# EAGLE board 3020 MFD2 V1_1 (EAGLE 7.3.0), part 1 of 2
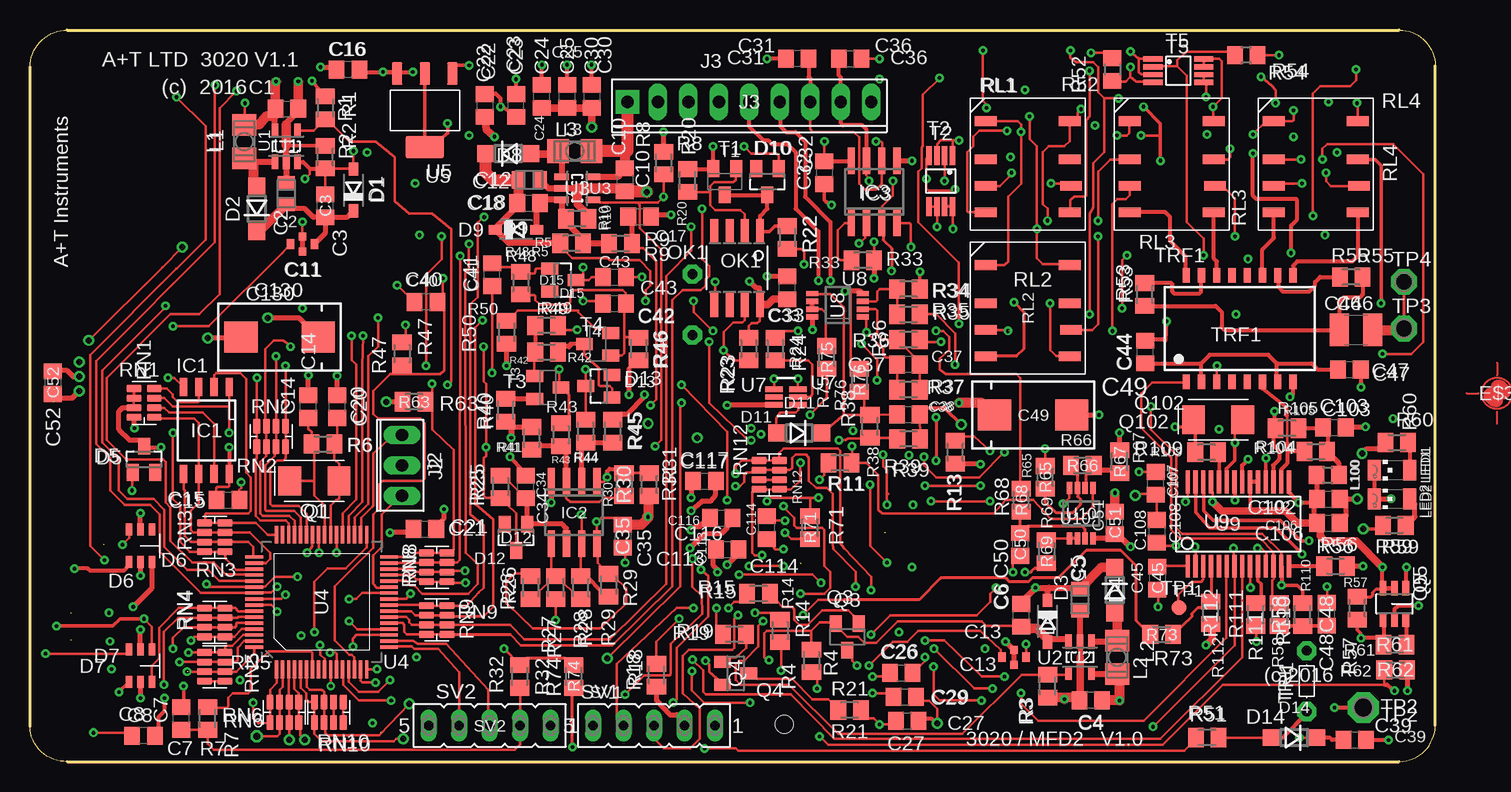
[diagram p0: board, top side]
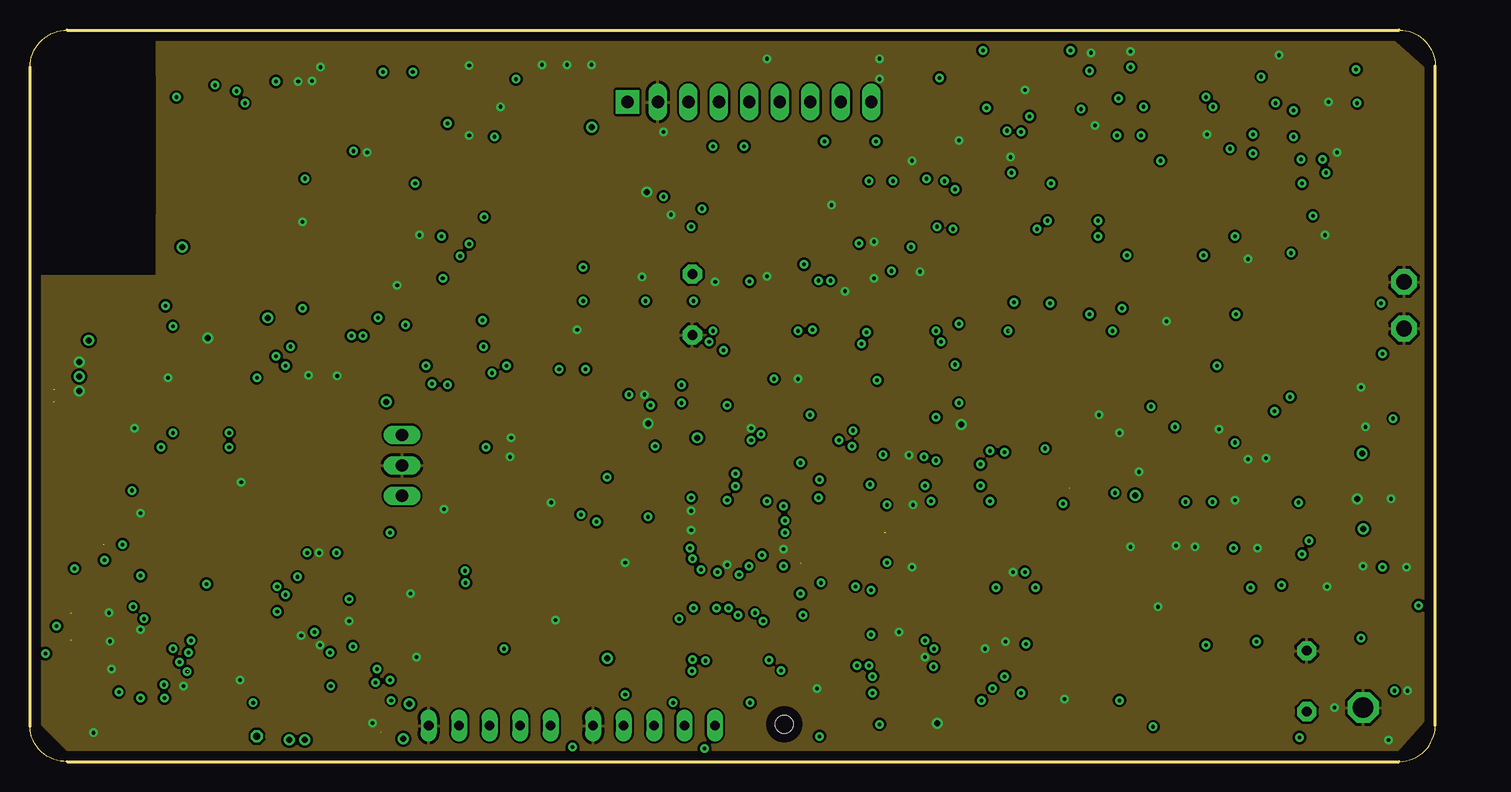
[diagram p1: board, inner layer GND]
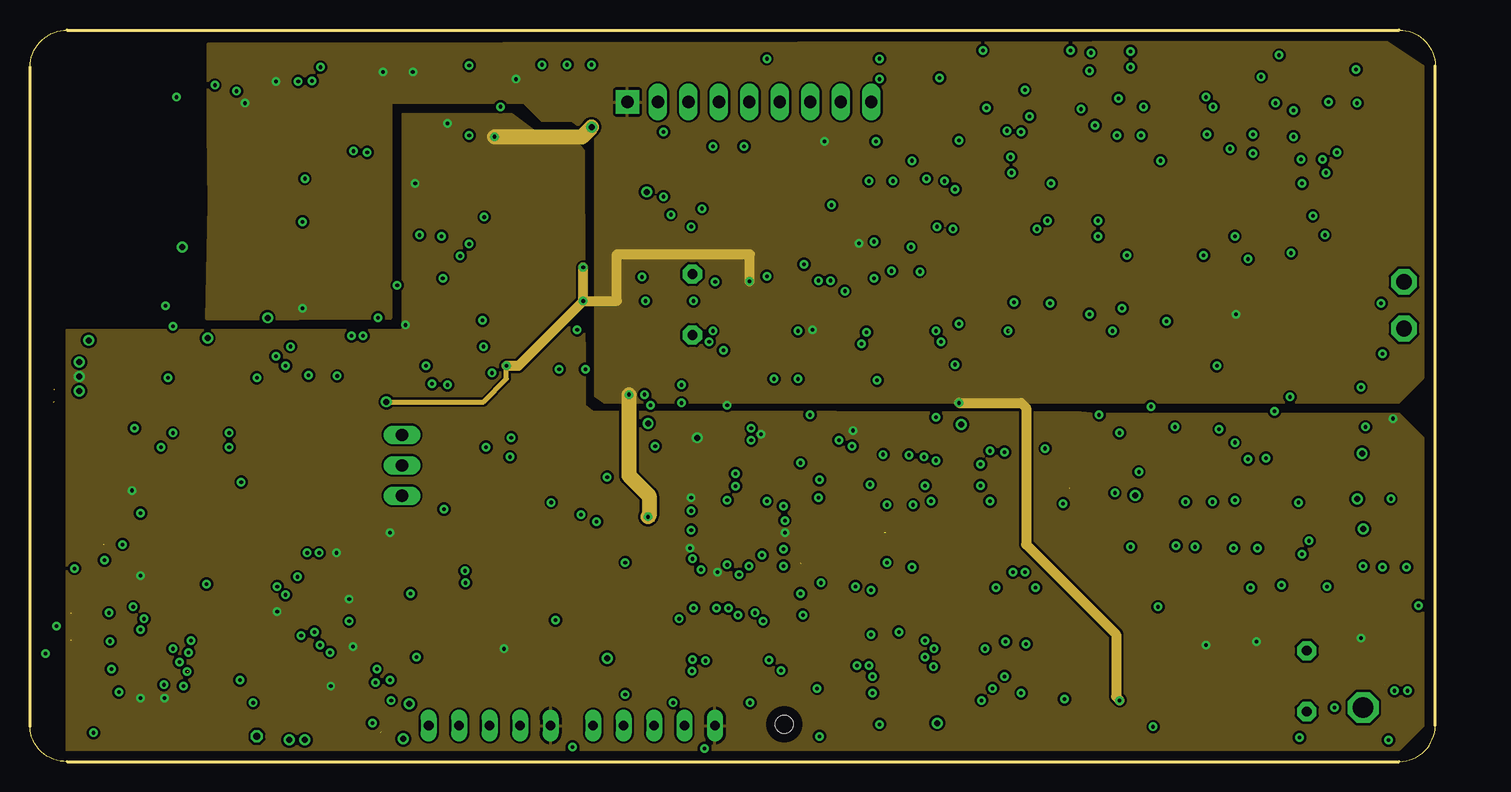
[diagram p2: board, inner layer 3V3&5V]
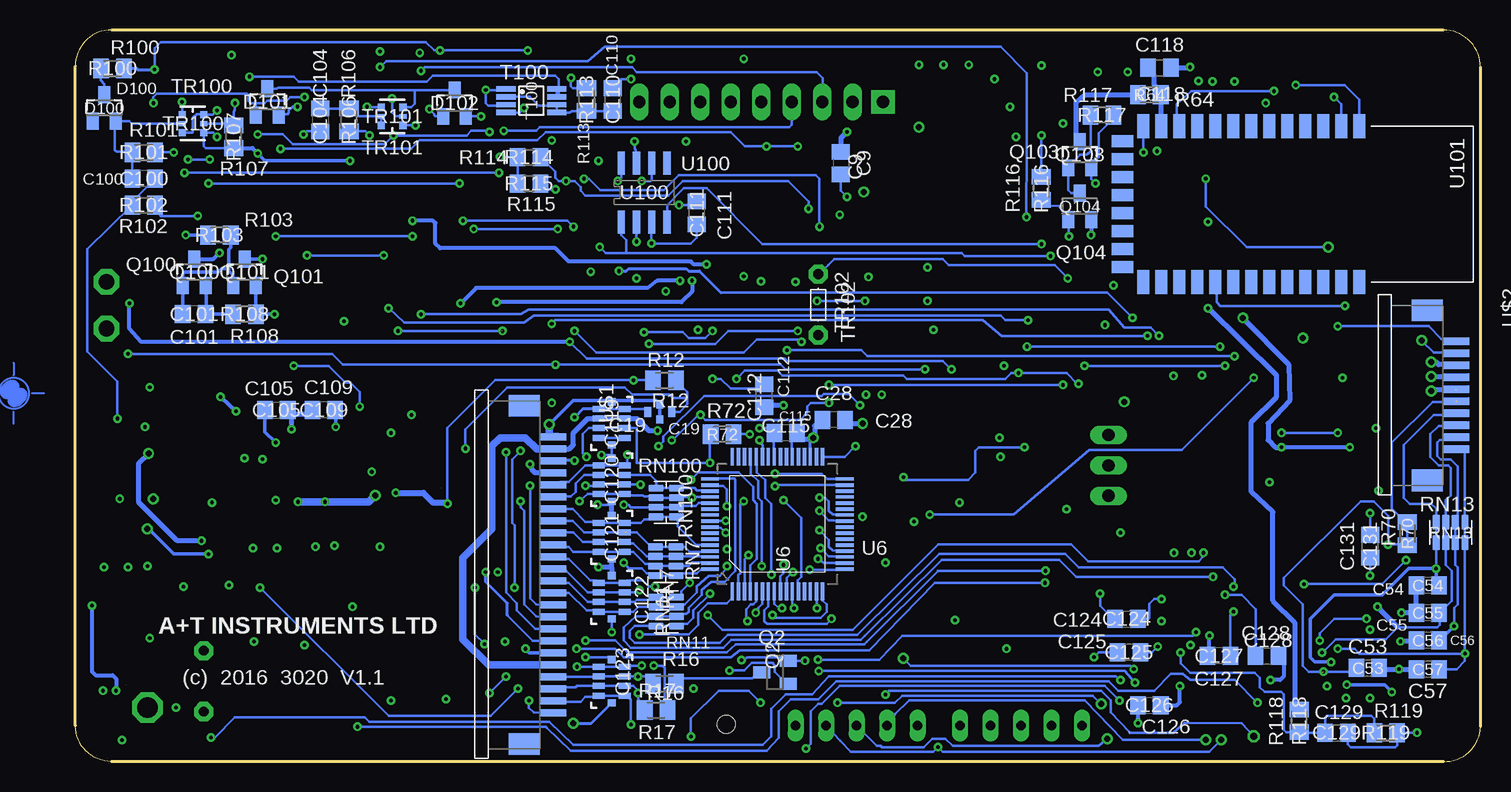
[diagram p3: board, bottom side, seen from below]

Size 117.1 x 61 mm. Coordinates in mm from the lower left corner, seen from the top.
Outline: 3.1,0 114.1,0 arc90 117.1,3 117.1,58 arc90 114.1,61 3.1,61 arc90 0,57.9 0,2.9 arc90 3.1,0
Copper layers (1*2*15*16): Top-VerticalRoutes 0.035mm / dielectric 0.5mm / GND 0.035mm / dielectric 0.5mm / 3V3&5V 0.035mm / dielectric 0.5mm / BottomnHorizontalroutes 0.035mm
Design rules "default *": minimum track width 0.2mm, minimum drill 0.3mm, track to track 6mil, track to pad 6mil, pad to pad 6mil, via to via 6mil, smd to smd 6mil, copper to edge 30mil, drill to drill 8mil, minimum pad ring 10mil, minimum via ring 8mil, stop-mask expansion 4mil, vias tented up to drill 0.31mm, thermal gap 10mil
Net classes: 0 default: width 0.2 mm, drill 0.2 mm, clearance 0.2 mm; 1 GND: width 0.2 mm, drill 0.2 mm, clearance 0.2 mm to class 0, clearance 0.2 mm; 2 5V: width 0.2 mm, drill 0.2 mm, clearance 0.2 mm to class 0, clearance 0.2 mm; 3 3v3: width 0.2 mm, drill 0.2 mm, clearance 0.2 mm to class 0, clearance 0.2 mm to class 1, clearance 0.2 mm to class 2, clearance 0.2 mm
Holes 1.5 mm at 62.85,3.1

## Footprints (pad centres in the part's own frame; a part is rotated, then mirrored left to right if it is on the bottom)
C0805 = smd 1.3 x 1.5: 1 -0.95,0; 2 0.95,0
CAPC2012X94N = smd 1.118 x 1.448: 1 -0.914,0; 2 0.914,0
MURATA_NFM21PC = smd 0.6 x 0.8: 1 -1,0; 3 1,0 | smd 0.6 x 0.65: 2 0,-0.625; 4 0,0.625
C1210 = smd 1.6 x 2.7: 1 -1.4,0; 2 1.4,0
CAPC7343X31 = smd 2.77 x 2.55: + 3.22,0; - -3.22,0
NFA31C-MURATA-SHORTED = smd 0.6 x 0.7: 1 -1.8,0; 2 1.8,0 | smd 0.5 x 1: 3 -1.2,-1.1; 4 -0.4,-1.1; 5 0.4,-1.1; 6 1.2,-1.1; 7 -1.2,1.1; 8 -0.4,1.1; 9 0.4,1.1; 10 1.2,1.1
SOD3616X135N-(SOD123) = smd 1.1 x 0.8: A 1.735,0 | smd 1.11 x 0.8: C -1.735,0
SOD123 = smd 1.4 x 1.4: A 1.9,0; C -1.9,0
SOT23 = smd 1 x 1.4: 1 -0.95,-1.1; 2 0.95,-1.1; 3 0,1.1
SOT23-6 = smd 0.55 x 1: 1 -0.95,-1.35; 2 0,-1.35; 3 0.95,-1.35; 4 0.95,1.35; 5 0,1.35; 6 -0.95,1.35
SOIC127P794203-L25N = smd 0.6 x 1.5: 1 -1.905,-3.63; 2 -0.635,-3.63; 3 0.635,-3.63; 4 1.905,-3.63; 5 1.905,3.63; 6 0.635,3.63; 7 -0.635,3.63; 8 -1.905,3.63
SO08 = smd 0.6 x 2.2: 1 -1.905,-2.6; 2 -0.635,-2.6; 3 0.635,-2.6; 4 1.905,-2.6; 5 1.905,2.6; 6 0.635,2.6; 7 -0.635,2.6; 8 -1.905,2.6
SO-08 = smd 0.6 x 2.2: 1 -1.905,-2.6; 2 -0.635,-2.6; 3 0.635,-2.6; 4 1.905,-2.6; 5 1.905,2.6; 6 0.635,2.6; 7 -0.635,2.6; 8 -1.905,2.6
10X03MTA = drill 1.016 long: 1 2.54,0; 2 0,0; 3 -2.54,0
10X09MTA = drill 1.016 pad 1.93 square: 1 10.16,0 | drill 1.016 long: 2 7.62,0; 3 5.08,0; 4 2.54,0; 5 0,0; 6 -2.54,0; 7 -5.08,0; 8 -7.62,0; 9 -10.16,0
L3225P = smd 1.8 x 2: 1 -1.4,0; 2 1.4,0
INDC2012X90 = smd 1.3 x 1.5: 1 -0.95,0; 2 0.95,0
LEDC3216X110L60N = smd 1.73 x 1.1: A 0,-1.47; C 0,1.47
SOIC08 = smd 0.66 x 2.032: 1 -1.905,-3.073; 2 -0.635,-3.073; 3 0.635,-3.073; 4 1.905,-3.073; 5 1.905,3.073; 6 0.635,3.073; 7 -0.635,3.073; 8 -1.905,3.073
ABRACON-ABM3 = smd 1.9 x 2.4: 1 -2.05,0; 2 2.05,0
SOT23-6' = smd 0.55 x 1.2: 1 -0.95,-1.3; 2 0,-1.3; 3 0.95,-1.3; 4 0.95,1.3; 5 0,1.3; 6 -0.95,1.3
M0805 = smd 1.3 x 1.6: 1 -0.95,0; 2 0.95,0
R0805 = smd 1.3 x 1.5: 1 -0.95,0; 2 0.95,0
OMRON-G6K-2F = smd 0.8 x 1.8: 1 -3.6,-3.5; 2 -0.4,-3.5; 3 1.8,-3.5; 4 4,-3.5; 5 4,3.5; 6 1.8,3.6; 7 -0.4,3.5; 8 -3.6,3.5
RESCAV80P325X165X90-8M = smd 0.6 x 1.22: 1 -1.2,-0.85; 2 -0.4,-0.85; 3 0.4,-0.85; 4 1.2,-0.85 | smd 0.6 x 1.25: 5 1.2,0.85; 6 0.4,0.85; 7 -0.4,0.85; 8 -1.2,0.85
RESCAV80P325X165X90-8M-SHORTED = smd 0.6 x 1.22: 1 -1.2,-0.85; 2 -0.4,-0.85; 3 0.4,-0.85; 4 1.2,-0.85 | smd 0.6 x 1.25: 5 1.2,0.85; 6 0.4,0.85; 7 -0.4,0.85; 8 -1.2,0.85
FE05-1 = drill 0.813 long: 1 -5.08,0; 2 -2.54,0; 3 0,0; 4 2.54,0; 5 5.08,0
SOT23-BEC = smd 1 x 1.4: B -0.95,-1.1; C 0,1.1; E 0.95,-1.1
SOP65P490X110-8L40N = smd 0.45 x 1.59: 1 -0.975,-2.115; 2 -0.325,-2.115; 3 0.325,-2.115; 4 0.975,-2.115; 5 0.975,2.115; 6 0.325,2.115; 7 -0.325,2.115; 8 -0.975,2.115
B1,27 = smd 1.27 x 1.27: TP 0,0
P1-17 = drill 1.702 pad 2.54 octagon: TP 0,0
P1-13 = drill 1.321 pad 2.159 octagon: TP 0,0
R-5 = drill 0.813 pad 1.6 octagon: 1 -2.54,0; 2 2.54,0
SOT363(SC-88) = smd 0.6 x 0.6: 1 -0.9,0.75; 3 -0.9,-0.75; 4 0.9,-0.75; 6 0.9,0.75 | smd 0.6 x 0.4: 2 -0.9,0; 5 0.9,0
N5 = smd 0.6 x 1.2: 1 -4.445,-4.445; 2 -3.175,-4.445; 3 -1.905,-4.445; 4 -0.635,-4.445; 5 0.635,-4.445; 6 1.905,-4.445; 7 3.175,-4.445; 8 4.445,-4.445; 9 4.445,4.445; 10 3.175,4.445; 11 1.905,4.445; 12 0.635,4.445; 13 -0.635,4.445; 14 -1.905,4.445; 15 -3.175,4.445; 16 -4.445,4.445
SOT23-5 = smd 0.55 x 1.2: 1 -0.95,-1.3; 2 0,-1.3; 3 0.95,-1.3; 4 0.95,1.3; 5 -0.95,1.3
QFP64-10X10MC = smd 1.473 x 0.279: 1 -5.613,3.759; 2 -5.613,3.251; 3 -5.613,2.743; 4 -5.613,2.261; 5 -5.613,1.753; 6 -5.613,1.245; 7 -5.613,0.762; 8 -5.613,0.254; 9 -5.613,-0.254; 10 -5.613,-0.762; 11 -5.613,-1.245; 12 -5.613,-1.753; 13 -5.613,-2.261; 14 -5.613,-2.743; 15 -5.613,-3.251; 16 -5.613,-3.759; 33 5.613,-3.759; 34 5.613,-3.251; 35 5.613,-2.743; 36 5.613,-2.261; 37 5.613,-1.753; 38 5.613,-1.245; 39 5.613,-0.762; 40 5.613,-0.254; 41 5.613,0.254; 42 5.613,0.762; 43 5.613,1.245; 44 5.613,1.753; 45 5.613,2.261; 46 5.613,2.743; 47 5.613,3.251; 48 5.613,3.759 | smd 0.279 x 1.473: 17 -3.759,-5.613; 18 -3.251,-5.613; 19 -2.743,-5.613; 20 -2.261,-5.613; 21 -1.753,-5.613; 22 -1.245,-5.613; 23 -0.762,-5.613; 24 -0.254,-5.613; 25 0.254,-5.613; 26 0.762,-5.613; 27 1.245,-5.613; 28 1.753,-5.613; 29 2.261,-5.613; 30 2.743,-5.613; 31 3.251,-5.613; 32 3.759,-5.613; 49 3.759,5.613; 50 3.251,5.613; 51 2.743,5.613; 52 2.261,5.613; 53 1.753,5.613; 54 1.245,5.613; 55 0.762,5.613; 56 0.254,5.613; 57 -0.254,5.613; 58 -0.762,5.613; 59 -1.245,5.613; 60 -1.753,5.613; 61 -2.261,5.613; 62 -2.743,5.613; 63 -3.251,5.613; 64 -3.759,5.613
SOT230P700X180-4L = smd 0.89 x 1.88: 1 -2.3,-3.065; 2 0,-3.065; 3 2.3,-3.065 | smd 3.23 x 1.88: 4 0,3.065
SOT65P210X100-6M = smd 0.44 x 1.53: 1 -0.65,-0.99; 2 0,-0.99; 3 0.65,-0.99; 4 0.65,0.99; 5 0,0.99; 6 -0.65,0.99
MSOP8 = smd 0.45 x 1.016: 1 -0.975,-2.1; 2 -0.325,-2.1; 3 0.325,-2.1; 4 0.975,-2.1; 5 0.975,2.1; 6 0.325,2.1; 7 -0.325,2.1; 8 -0.975,2.1
SOP65P780X200-28N = smd 0.45 x 1.9: 1 -4.225,-3.505; 2 -3.575,-3.505; 3 -2.925,-3.505; 4 -2.275,-3.505; 5 -1.625,-3.505; 6 -0.975,-3.505; 7 -0.325,-3.505; 8 0.325,-3.505; 9 0.975,-3.505; 10 1.625,-3.505; 11 2.275,-3.505; 12 2.925,-3.505; 13 3.575,-3.505; 14 4.225,-3.505; 15 4.225,3.505; 16 3.575,3.505; 17 2.925,3.505; 18 2.275,3.505; 19 1.625,3.505; 20 0.975,3.505; 21 0.325,3.505; 22 -0.325,3.505; 23 -0.975,3.505; 24 -1.625,3.505; 25 -2.275,3.505; 26 -2.925,3.505; 27 -3.575,3.505; 28 -4.225,3.505
SOIC127P600X175-8L87N = smd 0.6 x 1.91: 1 -1.905,-2.46; 2 -0.635,-2.46; 3 0.635,-2.46; 4 1.905,-2.46; 5 1.905,2.46; 6 0.635,2.46; 7 -0.635,2.46; 8 -1.905,2.46
BLUETOOTH_SMD = smd 2 x 1: 1 0,0; 2 0,-1.5; 3 0,-3; 4 0,-4.5; 5 0,-6; 6 0,-7.5; 7 0,-9; 8 0,-10.5; 9 0,-12; 10 0,-13.5; 11 0,-15; 12 0,-16.5; 13 0,-18; 22 13,-18; 23 13,-16.5; 24 13,-15; 25 13,-13.5; 26 13,-12; 27 13,-10.5; 28 13,-9; 29 13,-7.5; 30 13,-6; 31 13,-4.5; 32 13,-3; 33 13,-1.5; 34 13,0 | smd 1 x 1.8: 14 1.25,-19.75; 15 2.75,-19.75; 16 4.25,-19.75; 17 5.75,-19.75; 18 7.25,-19.75; 19 8.75,-19.75; 20 10.25,-19.75; 21 11.75,-19.75
68612414422 = smd 0.6 x 2.2: 1 -15.77,1.1; 2 -14.77,1.1; 3 -13.77,1.1; 4 -12.77,1.1; 5 -11.77,1.1; 6 -10.77,1.1; 7 -9.77,1.1; 8 -8.77,1.1; 9 -7.77,1.1; 10 -6.77,1.1; 11 -5.77,1.1; 12 -4.77,1.1; 13 -3.77,1.1; 14 -2.77,1.1; 15 -1.77,1.1; 16 -0.77,1.1; 17 0.23,1.1; 18 1.23,1.1; 19 2.23,1.1; 20 3.23,1.1; 21 4.23,1.1; 22 5.23,1.1; 23 6.23,1.1; 24 7.23,1.1 | smd 1.8 x 2.6: Z1 -18.37,-1.3; Z2 9.83,-1.3
CONN_10_WAY_FLEX = smd 0.6 x 2.2: 1 -4.34,2.37; 2 -3.34,2.37; 3 -2.34,2.37; 4 -1.34,2.37; 5 -0.34,2.37; 6 0.66,2.37; 7 1.66,2.37; 8 2.66,2.37; 9 3.66,2.37; 10 4.66,2.37 | smd 1.8 x 2.6: Z1 -6.94,-0.03; Z2 7.26,-0.03

## Placement (x,y rotation side)
C1  10u  [C0805]  21.4,54.42 0 top
C2  1u 35V  [CAPC2012X94N]  21.35,47.35 90 top
C3  DNF  [C0805]  24.6,46.34 90 top
C4  10u  [C0805]  88.4,5.1 180 top
C5  1u 35V  [CAPC2012X94N]  87.5,13.5 270 top
C6  DNF  [C0805]  82.6,12.2 90 top
C7  DNF  [C0805]  12.6,3.6 90 top
C8  100n  [C0805]  9.45,2.15 180 top
C9  100n  [C0805]  53.3,49.9 270 bottom
C10  10u  [C0805]  49.55,48.5 270 top
C11  NFM21PC475B1A3  [MURATA_NFM21PC]  22.7,43.15 180 top
C12  1u 35V  [CAPC2012X94N]  41.6,48.5 180 top
C13  NFM21PC475B1A3  [MURATA_NFM21PC]  82,8.7 180 top
C14  18p  [C0805]  23.2,29.6 90 top
C15  100n  [C0805]  16.5,21.8 0 top
C16  100n  [C0805]  26.5,57.7 180 top
C17  4u7  [C0805]  50.8,45.45 0 top
C18  22p  [C0805]  41.55,46.55 0 top
C19  NFM21PC475B1A3  [MURATA_NFM21PC]  68.4,29.15 180 bottom
C20  18p  [C0805]  25.6,29.6 90 top
C21  100n  [C0805]  32.9,19.4 0 top
C22  22u  [C0805]  37.9,54.7 270 top
C23  10u  [C0805]  40.5,54.7 90 top
C24  1n  [C0805]  42.65,55.45 90 top
C25  100n  [C0805]  44.77,55.45 90 top
C26  100n  [C0805]  72.6,7.4 0 top
C27  100n  [C0805]  73.1,3.4 0 top
C28  100n  [C0805]  53.9,28.5 180 bottom
C29  100n  [C0805]  72.9,5.4 0 top
C30  22u  [C0805]  46.8,55.45 270 top
C31  1n  [C0805]  63.94,58.6 180 top
C32  100n  [C0805]  66.2,49.1 270 top
C33  100n  [C0805]  63.1,39.5 90 top
C34  1n  [C0805]  41.3,22.9 90 top
C35  100n  [C0805]  49.4,18.8 270 top
C36  1n  [C0805]  68.35,58.6 0 top
C37  18p  [C0805]  73.2,33.1 180 top
C38  100n  [C0805]  73.2,28.94 0 top
C39  100n  [C0805]  110.4,1.8 0 top
C40  100n  [C0805]  33,38.3 180 top
C41  10u  [C0805]  38.5,40.6 90 top
C42  1n  [C0805]  48.7,38.2 0 top
C43  100n  [C0805]  48.7,40.4 0 top
C44  10n  [C0805]  92.95,34.15 90 top
C45  10u  [C0805]  93.95,15.3 270 top
C46  1n 2kV  [C1210]  110.5,36 0 top
C47  10n  [C0805]  109.95,32.7 0 top
C48  100n  [C0805]  108.05,12.3 90 top
C49  100u  [CAPC7343X31]  83.6,28.9 180 top
C50  4u7  [C0805]  82.5,18.1 270 top
C51  100n  [C0805]  90.4,19.9 90 top
C52  100n  [C0805]  1.9,31.6 270 top
C53  DNF  [C0805]  9.4,7.8 0 bottom
C54  DNF  [C0805]  4.4,14.7 180 bottom
C55  DNF  [C0805]  4.4,12.4 180 bottom
C56  DNF  [C0805]  4.4,10.1 180 bottom
C57  DNF  [C0805]  4.4,7.7 180 bottom
C100  1u  [C0805]  111.4,48.6 180 bottom
C101  10N  [C0805]  107.2,37.3 180 bottom
C102  100n  [C0805]  108.2,21.9 0 top
C103  100n  [C0805]  108.7,27.85 0 top
C104  1u  [C0805]  96.7,53.5 270 bottom
C105  27p  [C0805]  100.35,29.3 0 bottom
C106  100n  [C0805]  108.2,19.9 0 top
C107  100n  [C0805]  93.8,23.2 90 top
C108  100n  [C0805]  93.9,19.2 270 top
C109  27p  [C0805]  96.4,29.3 180 bottom
C110  100n  [C0805]  72.3,55.2 90 bottom
C111  100n  [C0805]  65.3,45.75 90 bottom
C112  100n  [C0805]  59.7,30.5 90 bottom
C113  100n  [C0805]  58.1,17.7 0 top
C114  10u  [C0805]  61.4,19.5 90 top
C115  100n  [C0805]  57.9,27.4 180 bottom
C116  100n  [C0805]  57.6,20.3 0 top
C117  100n  [C0805]  56.2,23.4 0 top
C118  100n  [C0805]  26.75,57.85 0 bottom
C119  MURATA-NFA31CC  [NFA31C-MURATA-SHORTED]  72.4,28.2 90 bottom
C120  MURATA-NFA31CC  [NFA31C-MURATA-SHORTED]  72.4,23.5 90 bottom
C121  MURATA-NFA31CC  [NFA31C-MURATA-SHORTED]  72.4,18.7 90 bottom
C122  MURATA-NFA31CC  [NFA31C-MURATA-SHORTED]  72.4,13.7 90 bottom
C123  MURATA-NFA31CC  [NFA31C-MURATA-SHORTED]  72.4,6.7 90 bottom
C124  100n  [C0805]  29.5,11.9 0 bottom
C125  100n  [C0805]  29.3,9.1 180 bottom
C126  100n  [C0805]  27.6,4.7 0 bottom
C127  100n  [C0805]  21.8,8.8 180 bottom
C128  10u  [C0805]  17.8,8.8 0 bottom
C129  100n  [C0805]  12,2.4 0 bottom
C130  100u  [CAPC7343X31]  20.8,35.4 0 top
C131  100n  [C0805]  9.2,17.95 90 bottom
D1  24V 500mW  [SOD3616X135N-(SOD123)]  26.95,47.65 90 top
D2  MBR0530  [SOD123]  18.9,46.08 90 top
D3  24V 500mW  [SOD3616X135N-(SOD123)]  84.8,11.7 270 top
D4  MBR0530  [SOD123]  90.4,14.3 270 top
D5  BAT54  [SOT23]  9.5,25.2 0 top
D6  TPD4E001DBV  [SOT23-6]  9.2,18 180 top
D7  TPD4E001DBV  [SOT23-6]  9.2,8 180 top
D8  MBR0530  [SOD123]  39.85,50.7 0 top
D9  24V 500mW  [SOD3616X135N-(SOD123)]  40.5,44.35 0 top
D10  BAV199  [SOT23]  61.45,48.35 180 top
D11  MBR0530  [SOD123]  64.1,27.4 180 top
D12  BAV199  [SOT23]  40.5,18.7 180 top
D13  BAV199  [SOT23]  47.4,31.3 90 top
D14  MBR0530  [SOD123]  105.34,2 180 top
D15  BAV199  [SOT23]  44.4,40.14 270 top
D100  BAT54A  [SOT23]  114.7,54.5 0 bottom
D101  BAT54A  [SOT23]  101.1,55 0 bottom
D102  BAT54A  [SOT23]  85.5,54.9 0 bottom
E$1  [PASS-ROUND]  -5.9,55 0 top  (outside the outline)
E$2  [PASS-ROUND]  -5.9,6 0 top  (outside the outline)
E$3  [PASS-ROUND]  122.25,30.7 0 top  (outside the outline)
IC1  SST26VF064B  [SOIC127P794203-L25N]  14.7,27.6 180 top
IC2  TLC393D  [SO08]  45.34,20.78 180 top
IC3  SN65176D  [SO-08]  70.35,47.5 0 top
J2  1X3  [10X03MTA]  31,24.7 90 top
J3  B06-1X9-AG1-G  [10X09MTA]  59.95,55 180 top
L1  1224AS-H-100M  [L3225P]  17.85,51.7 270 top
L2  1224AS-H-100M  [L3225P]  90.6,8.7 90 top
L3  1224AS-H-100M  [L3225P]  45.4,50.9 180 top
L100  120R@100M  [INDC2012X90]  108.15,23.9 0 top
LED1  GRN  [LEDC3216X110L60N]  113.5,24.3 90 top
LED2  YLW  [LEDC3216X110L60N]  113.5,21.9 90 top
OK1  HCPL0530  [SOIC08]  58.93,41.16 180 top
Q1  12MHz  [ABRACON-ABM3]  23.7,23.4 0 top
Q2  BSS123  [SOT23]  58.8,7.45 90 bottom
Q3  BSS123  [SOT23]  68.1,10.4 180 top
Q4  BSS123  [SOT23]  58.8,7.35 270 top
Q5  TPS2708  [SOT23-6']  113.7,13.15 180 top
Q100  NTR2101P  [SOT23]  107.2,40.8 0 bottom
Q101  BC807  [SOT23]  103,40.8 0 bottom
Q102  25MHz  [ABRACON-ABM3]  99,28.5 0 top
Q103  NTR2101P  [SOT23]  33.4,50.6 0 bottom
Q104  BSS123  [SOT23]  33.4,46.3 0 bottom
R1  100k  [M0805]  24.6,54.5 90 top
R2  59R  [M0805]  24.6,50.4 270 top
R3  100k  [M0805]  84.8,6.3 270 top
R4  59R  [M0805]  65.13,8.4 90 top
R5  680k  [M0805]  45.14,43.21 0 top
R6  1M  [M0805]  24.41,26.47 180 top
R7  100  [M0805]  14.8,3.6 270 top
R8  100k  [M0805]  52.8,49.9 90 top
R9  DNF for 3020  [M0805]  49.2,43.2 180 top
R10  100k  [M0805]  45.6,45.25 0 top
R11  100k  [M0805]  67.5,24.9 0 top
R12  DNF for 3020  [M0805]  68,31.8 180 bottom
R13  100R  [M0805]  77.1,25.8 270 top
R14  1k  [M0805]  62.5,10.9 90 top
R15  1k  [M0805]  60.7,14 0 top
R16  0R  [M0805]  68,6.5 180 bottom
R17  0R  [M0805]  68.7,4.3 180 bottom
R18  100R  [M0805]  52.2,7.2 270 top
R19  1k  [M0805]  58.7,10.6 0 top
R20  100  [M0805]  54.8,48.45 270 top
R21  0R  [M0805]  68.3,4.3 0 top
R22  680  [M0805]  63.1,43.7 90 top
R23  10K  [M0805]  59.9,34.4 90 top
R24  47R  [M0805]  62.1,34.4 90 top
R25  680k  [M0805]  39.2,22.9 90 top
R26  47k  [M0805]  41.7,14.5 90 top
R27  56k  [M0805]  43.8,14.5 90 top
R28  200k  [M0805]  45.9,14.5 270 top
R29  4k7  [M0805]  48.2,14.7 90 top
R30  1M5  [M0805]  49.5,23.1 90 top
R31  47k  [M0805]  51.6,23.1 270 top
R32  10K  [M0805]  40.8,7.1 90 top
R33  10k  [M0805]  69.4,41.8 0 top
R34  100K  [M0805]  73.2,39.4 0 top
R35  100k  [M0805]  73.2,37.3 180 top
R36  100k  [M0805]  73.2,35.2 180 top
R37  100k  [M0805]  73.2,31 0 top
R38  1k  [M0805]  70,27.95 270 top
R39  100k  [M0805]  73.22,26.9 0 top
R40  82R  [M0805]  39.65,29.3 270 top
R41  1M5  [M0805]  41.8,26.95 90 top
R42  4k7  [M0805]  43.05,34.15 180 top
R43  47k  [M0805]  44.25,27.25 90 top
R44  47k  [M0805]  46.3,27.55 90 top
R45  470k  [M0805]  48.55,27.55 90 top
R46  10k  [M0805]  50.7,34.4 90 top
R47  10k  [M0805]  31,34 90 top
R48  10k  [M0805]  40.9,39.9 90 top
R49  4k7  [M0805]  43.05,36.35 0 top
R50  82R  [M0805]  39.7,35.8 90 top
R51  10k  [M0805]  98.1,2 0 top
R52  1M  [R0805]  90.2,57.7 270 top
R53  75R  [M0805]  92.9,38.95 270 top
R54  1M  [R0805]  101.35,58.9 180 top
R55  75R  [M0805]  110.1,40.4 0 top
R56  2.32k 1%  [M0805]  108.8,16.3 180 top
R57  DNF  [M0805]  110.6,12.8 270 top
R58  49R9  [M0805]  104.1,12.25 90 top
R59  180R  [M0805]  113.7,19.7 180 top
R60  180R  [M0805]  113.9,26.6 180 top
R61  DNF  [M0805]  113.75,9.75 180 top
R62  100k  [M0805]  113.8,7.65 180 top
R63  10k  [M0805]  32,30 0 top
R64  1R  [M0805]  27.6,55.6 180 bottom
R65  100R  [M0805]  84.6,23.7 270 top
R66  100k  [M0805]  87.7,24.7 180 top
R67  100k  [M0805]  90.8,25 270 top
R68  100k  [M0805]  82.6,21.8 270 top
R69  100R  [M0805]  84.7,17.5 90 top
R70  DNF  [M0805]  6.1,19 90 bottom
R71  4k7  [M0805]  65,19.5 270 top
R72  4k7  [M0805]  63.2,27.3 0 bottom
R73  100R  [M0805]  94.3,10.6 180 top
R74  10k  [M0805]  45.3,7.1 90 top
R75  DNF  [M0805]  66.4,33.7 270 top
R76  DNF  [M0805]  69.1,31.8 90 top
R100  10k  [M0805]  114,57.8 180 bottom
R101  10k  [M0805]  111.4,50.8 180 bottom
R102  100k  [M0805]  111.4,46.4 180 bottom
R103  10k  [M0805]  105.1,43.9 0 bottom
R104  49R9  [M0805]  107.15,25.85 180 top
R105  49R9  [M0805]  104.75,27.8 0 top
R106  10k  [M0805]  94.3,53.5 270 bottom
R107  10k  [M0805]  103.9,52.1 270 bottom
R108  5R6  [M0805]  103,37.3 0 bottom
R109  100R  [M0805]  98.05,25.8 0 top
R110  49R9  [M0805]  106.05,12.25 270 top
R111  100k  [M0805]  102.15,12.25 270 top
R112  100k  [M0805]  98.4,12.4 270 top
R113  10k  [M0805]  74.5,55.2 90 bottom
R114  1M  [R0805]  79.3,50.4 0 bottom
R115  1M  [R0805]  79.3,48.2 0 bottom
R116  100k  [M0805]  36.6,47.8 270 bottom
R117  100k  [M0805]  31.55,53.9 0 bottom
R118  10k  [M0805]  15.1,3.4 270 bottom
R119  10k  [M0805]  7.9,2.4 180 bottom
RL1  OMRON-G6K-2FY-5VDC  [OMRON-G6K-2F]  83.15,49.8 270 top
RL2  OMRON-G6K-2FY-5VDC  [OMRON-G6K-2F]  83.15,37.8 270 top
RL3  OMRON-G6K-2FY-5VDC  [OMRON-G6K-2F]  95.15,49.8 270 top
RL4  OMRON-G6K-2FY-5VDC  [OMRON-G6K-2F]  107.15,49.8 270 top
RN1  10k  [RESCAV80P325X165X90-8M]  9.5,29.9 90 top
RN2  DNF  [RESCAV80P325X165X90-8M-SHORTED]  20.1,27.1 0 top
RN3  DNF  [RESCAV80P325X165X90-8M-SHORTED]  15.4,18.7 90 top
RN4  DNF  [RESCAV80P325X165X90-8M-SHORTED]  15.4,11.6 90 top
RN5  DNF  [RESCAV80P325X165X90-8M-SHORTED]  15.4,7.9 90 top
RN6  100R  [RESCAV80P325X165X90-8M-SHORTED]  21.2,4.1 0 top
RN7  100R  [RESCAV80P325X165X90-8M-SHORTED]  67.9,16.7 90 bottom
RN8  DNF  [RESCAV80P325X165X90-8M-SHORTED]  33.9,16.2 90 top
RN9  100R  [RESCAV80P325X165X90-8M-SHORTED]  33.9,11.8 90 top
RN10  100R  [RESCAV80P325X165X90-8M-SHORTED]  24.9,4.1 0 top
RN11  100R  [RESCAV80P325X165X90-8M-SHORTED]  67.85,12.5 90 bottom
RN12  100R  [RESCAV80P325X165X90-8M-SHORTED]  61.6,23.9 90 top
RN13  DNF  [RESCAV80P325X165X90-8M-SHORTED]  2.5,19.1 0 bottom
RN100  100R  [RESCAV80P325X165X90-8M-SHORTED]  67.85,21.6 90 bottom
SV1  NOT FITTED  [FE05-1]  52,3 180 top
SV2  NOT FITTED  [FE05-1]  38.3,3 180 top
T1  BC817  [SOT23-BEC]  57.9,48.35 180 top
T2  ZXMD63N03X  [SOP65P490X110-8L40N]  75.9,48.4 180 top
T3  BC817  [SOT23-BEC]  43.15,31.2 270 top
T4  BC807  [SOT23-BEC]  47.3,34.8 90 top
T5  ZXMD63N03X  [SOP65P490X110-8L40N]  95.7,57.6 270 top
T100  ZXMD63N03X  [SOP65P490X110-8L40N]  79.1,55.1 270 bottom
TP1  TPB1,27  [B1,27]  95.75,12.85 0 top
TP2  PTR1PAD1-17  [P1-17]  111.1,4.5 0 top
TP3  PTR1PAD1-13  [P1-13]  114.5,36.1 0 top
TP4  PTR1PAD1-13  [P1-13]  114.5,40 0 top
TR1  HCZ-D5-A  [R-5]  106.4,6.7 90 top
TR100  NX3008CBKS  [SOT363(SC-88)]  107.3,53.2 0 bottom
TR101  NX3008CBKS  [SOT363(SC-88)]  90.7,53.8 180 bottom
TR102  NTCLE100E3103JB0  [R-5]  55.2,38.1 270 bottom
TRF1  HX1188NL  [N5]  100.8,36.1 0 top
U1  TPS61041DBVR  [SOT23-5]  21.35,51.3 0 top
U2  TPS61041DBVR  [SOT23-5]  87.5,8.7 180 top
U3  TPS61041DBVR  [SOT23-5]  45.6,47.8 270 top
U4  dsPIC33EP512MC806  [QFP64-10X10MC]  24.3,13.3 90 top
U5  AZ1117  [SOT230P700X180-4L]  32.9,54.3 180 top
U6  PIC24FJ256DA206  [QFP64-10X10MC]  58.6,19.8 90 bottom
U7  ADG742BKSZ  [SOT65P210X100-6M]  63,30.4 90 top
U8  LTC6087  [MSOP8]  67.3,38.05 90 top
U9  ENC28J60-SOP  [SOP65P780X200-28N]  100.7,19.8 0 top
U10  LM2904A  [MSOP8]  87.6,20.7 0 top
U100  MCP2551  [SOIC127P600X175-8L87N]  69.7,47.45 0 bottom
U101  HC_05  [BLUETOOTH_SMD]  10.1,53 270 bottom
U$1  52271_2479  [68612414422]  78.4,11.3 270 bottom
U$2  52271_1079  [CONN_10_WAY_FLEX]  4.4,30.7 270 bottom

## Library data of the parts
C1 C3 C4 C6-C10 C14-C18 C20-C48 C50-C57 C100-C118 C124-C129 C131 L1-L3 R1-R51 R53 R55-R76 R100-R113 R116-R119 = rcl
C2 C5 C12 = Capacitors_AandT; MANUFACTURER: TAIYO YUDEN; MPN: GMK212B7105KG-T; SUPPLIER: RS; SUPPLIER_PART_NOS: 758-3313
C11 C13 C19 = Capacitors_AandT; FARNELL: 2470496
C49 C130 = Capacitors_AandT; DIGIKEY: 399-12105-1-ND; MANUFACTURER: Kemet; MOUSER: 80-T598D107M016E050; MPN: T598D107M016ATE050; PACKAGE: 7343; VOLTAGE: 16V
C119-C123 = Capacitors_AandT; NOTE: PINS SHORTED
D1 D3 D9 = Diodes_AnT; FARNELL: 1431284; MANUFACTURER: ON-SEMI; MFN: MMSZ5252BT1G
D2 D4 D5 D8 D10-D15 D100-D102 = diode
D6 D7 = Diodes_AnT
E$1-E$3 = marks
IC1 = microchip; MF: MICROCHIP; MOUSER: 579-ST26VF064B104ISM; MPN: 25AA080/SN; OC_FARNELL: 1816072; OC_NEWARK: 92C7351
IC2 = linear
IC3 = texas; MF: TEXAS INSTRUMENTS; MPN: SN65176BD; OC_FARNELL: 9589970; OC_NEWARK: 08F5891
J2 J3 = con-amp
L100 = IND_AandT; FARNELL: 1635711; MANUFACTURER: WURTH; MPN: 74279202; RS: 358-6721
LED1 = led; FARNELL: 2062307
LED2 = led; FARNELL: 2062218; MANUFACTURER: Lumex; MPN: SML-LX1206SYC-TR
OK1 = Opto_AandT; FARNELL: 9995161; MF: FAIRCHILD SEMICONDUCTOR; MPN: HCPL0530; PACKAGE: SOIC-8
Q1 = Crystals_AnT; FARNELL: 2101327
Q2-Q4 Q104 = transistor-small-signal
Q5 = Transistor_AandT; FARNELL: 2323775; MANUFACTURER: TI; MARKING: AUA; MPN: TPS27081A; PACKAGE: SOT23-6; RS: 809-5429
Q100 Q103 = Transistor_AandT; FARNELL: 1431297; MANUFACTURER: ON-SEMI; MPN: NTR2101P; PACKAGE: SOT23; RS: 780-4739 PK25
Q101 = Transistor_AandT; FARNELL: 1081221; MANUFACTURER: NXP; MARKING: 5B*; MOQ-FARNELL: 10; MPN: BC807-25; PACKAGE: SOT-23
Q102 = Crystals_AnT; FARNELL: 2101328
R52 R54 R114 R115 = resistor
RL1-RL4 = Magnetics_AandT; FARNELL: 4446239
RN1 = Resistor-AandT; FARNELL: 2060167; MANUFACTURER: PANASONIC
RN2-RN13 RN100 = Resistor-AandT; FARNELL: 2060157; MANUFACTURER: PANASONIC; MPN: EXBV8V101JV; RS: 665-2887
SV1 SV2 = con-lsta; OC_FARNELL: unknown; OC_NEWARK: unknown
T1 T3 T4 = transistor
T2 T5 T100 = zetex
TP1-TP4 = testpad
TR1 TR102 = discrete
TR100 TR101 = Transistor_AandT; MANUFACTURER: NXP; MARKING: LD%; MPN: NX3008CBKS; PACKAGE: SOT-363
TRF1 = Magnetics_AandT
U1-U3 = v-reg-3; MANUFACTURER: TI; MPN: TPS61041DBVR; PACKAGE: SOT23-5
U4 = dsPIC33EP256MU806; FARNELL: 2425985; MANUFACTURER: MICROCHIP; MOUSER: DSPIC33EP512MC806-I/PT-ND; PACKAGE: TQFP-64
U5 = ICs_AandT; MANUFACTURER: DIODES INC; MPN: AZ1117CH-3.3TRG1; PACKAGE: SOT223-3; RS: 828-7609
U6 = dsPIC33EP256MU806; MANUFACTURER: MICROCHIP; MOUSER: 579-PIC24FJ256DA206I; PACKAGE: TQFP-64
U7 = ICs_AandT; MANUFACTURER: AD; MARKING: SGB; MPN: ADG742; PACKAGE: SOT23-6
U8 U10 = ICs_AandT
U9 = Microchip_AandT; DIGIKEY: ENC28J60-I/SS-ND; FARNELL: 1811239; MANUFACTURER: MICROCHIP; MPN: ENC28J60-I/SS; PACKAGE: SSOP-28; RS: 770-7755
U100 = Microchip_AandT; FARNELL: 1467746; MANUFACTURER: MICROCHIP; MFN: MCP2551-E/SN; MOUSER: 579-MCP2551-E/SN; PACKAGE: SOIC-8
U101 = Bluetooth
U$1 U$2 = MFD_parts

## Nets
!CE_FL: IC1.1 RN1.3 RN3.8
+3V3 [3v3]: C8.1 C21.1 C22.2 C24.1 C25.1 C28.2 C30.2 C52.1 C100.1 C113.1 C115.1 C116.2 C117.1 C119.5 C124.2 C125.1 C126.2 C127.1 C131.1 D5.1 D6.5 D7.5 Q5.4 Q103.2 R32.2 R47.2 R57.2 R61.2 R71.2 R72.2 R74.2 R102.2 R111.2 R112.2 R117.2 SV1.1 SV2.1 U4.10 U4.19 U4.26 U4.38 U4.57 U5.2 U5.4 U6.10 U6.19 U6.26 U6.35 U6.38 U6.57 U$2.4
+5V [5V]: C1.1 C4.1 C10.1 C16.1 C23.2 C32.1 C33.1 C35.1 C42.1 C43.1 C49.+ C111.1 C112.1 D15.3 IC2.8 IC3.2 IC3.8 J3.1 L1.1 L2.1 L3.1 OK1.8 Q101.2 R23.2 R26.2 R29.2 R31.2 R46.1 R50.1 R63.1 R108.2 R118.1 U1.5 U2.5 U3.5 U5.3 U7.6 U8.8 U100.3
BLUETOOTH_PWR: Q104.1 R116.2 RN2.5
CAN-RX: U4.28 U100.4
CAN-SLEEP: IC3.3 U4.35 U100.8
CK_LCD: RN6.4 SV1.4 U6.15
CLK_FL: IC1.6 RN1.1 RN3.6
COMMSA: D13.3 R35.1 R44.2 RL4.2
COMMSB: R36.1 R43.2 RL4.7 T3.C
CONTRAST: R11.1 U6.4
DI_LCD: RN10.1 SV1.3 U6.16
DO_LCD: RN10.2 U6.17
EEPROM3V3 [3v3]: C15.1 C130.+ D5.3 IC1.8 RN1.5 RN1.6 RN1.7
ETHRX+: RL3.5 TRF1.14
ETHRX-: RL3.4 TRF1.16
ETHTX+: RL4.5 TRF1.9
ETHTX-: RL4.4 TRF1.11
GND [GND]: C1.2 C2.2 C4.2 C5.2 C7.2 C8.2 C9.1 C10.2 C11.2 C11.4 C12.1 C13.2 C13.4 C14.2 C15.2 C16.2 C17.2 C19.2 C19.4 C20.2 C21.2 C22.1 C23.1 C24.2 C25.2 C26.2 C27.2 C28.1 C29.2 C30.1 C31.2 C32.2 C33.2 C34.2 C35.2 C36.2 C38.2 C39.2 C40.2 C43.2 C44.2 C45.2 C46.2 C47.2 C48.2 C49.- C50.2 C51.1 C52.2 C53.2 C54.2 C55.2 C56.2 C57.2 C102.2 C103.2 C104.2 C105.2 C106.2 C107.2 C108.2 C109.2 C110.2 C111.2 C112.2 C113.2 C114.1 C115.2 C116.1 C117.2 C118.2 C119.1 C119.2 C120.1 C120.2 C121.1 C121.2 C122.1 C122.2 C123.1 C123.2 C124.1 C125.2 C126.1 C127.2 C128.2 C129.2 C130.- C131.2 D6.2 D7.2 IC1.4 IC2.4 IC3.5 J2.2 J3.2 LED1.C LED2.C OK1.5 Q5.1 Q101.3 Q104.2 R1.2 R2.1 R3.2 R4.1 R8.2 R10.2 R27.1 R33.2 R34.2 R39.2 R40.2 R41.2 R45.2 R49.2 R52.1 R54.1 R56.1 R62.1 R67.1 R76.2 R101.1 R103.1 R114.1 R115.1 R116.1 R119.1 RN1.8 SV1.5 SV2.5 T2.1 T2.3 T5.1 T5.3 T100.1 T100.3 TP2.TP TP3.TP TP4.TP TR1.2 TR100.1 TR101.1 TR102.2 U1.2 U2.2 U3.2 U4.9 U4.20 U4.25 U4.41 U5.1 U6.9 U6.20 U6.25 U6.41 U7.3 U8.4 U9.2 U9.11 U9.18 U9.21 U9.22 U10.4 U100.2 U101.13 U$1.1 U$1.19 U$2.3 U$2.5
HI-2-SET-RELAYS: R113.2 U4.36
HI-4-RELAY-RESET: R100.1 R102.1 T100.4 TR101.2 U4.37
ID: C129.1 R118.2 R119.2 U4.11
KB0: D7.6 RN4.5
KB1: D7.4 RN4.6
KB2: C57.1 D7.3 RN4.7 RN13.4
KB3: C56.1 D7.1 RN4.8 RN13.3
KB4: C55.1 D6.6 RN5.5 RN13.2
KB5: C54.1 D6.4 RN5.6 RN13.1
KB6: C53.1 D6.3 R70.1 R70.2 RN5.7 U$2.6
KEY_BT: U4.53 U101.26
KEYLEDA: C11.3 U$2.1
KEYLEDK: C3.2 D1.A R2.2 U1.3 U$2.2
KEYSW: D2.A L1.2 U1.1
LCD_CONTRAST: C9.2 R8.1 U3.4 U6.33
LCD_FB: C18.2 D9.A R5.2 R9.2 R10.1 U3.3
LCD_SW: D8.A L3.2 U3.1
LCDVOLTS: C12.2 C18.1 C51.2 D8.C D9.C R5.1 R12.2 U10.8
LDA: LED1.A R60.1
LDB: LED2.A R59.1
LEDA: R59.2 U9.27
LEDB: R60.2 U9.26
LEDPWR: C2.1 C3.1 C11.1 D1.C D2.C
LIM5V [5V]: Q100.3 R106.2 R107.2 TR100.4 TR101.4
MCLR: C7.1 R7.2 R32.1 SV2.2
MR_LCD: R18.2 R74.1 RN6.3 SV1.2
N$1: IC2.2 R44.1 R45.1
N$2: J3.3 RL1.5
N$3: C34.1 D12.1 IC2.6 R25.2
N$4: IC2.3 R30.1 R41.1 R43.1
N$5: Q5.6 R61.1
N$6: R40.1 T3.E
N$7: R50.2 T4.E
N$8: R42.2 R49.1 T3.B
N$9: IC2.5 R26.1 R27.2 R28.2
N$10: C128.1 U4.56
N$11: Q4.3 R21.1
N$13: J3.4 RL1.4
N$14: R109.2 U9.24
N$15: C42.2 R46.2 R48.1 T4.B
N$16: C41.2 D15.1 R48.2
N$17: R7.1 U4.7
N$18: C14.1 Q1.1 R6.2 U4.40
N$19: OK1.2 R20.2 T1.B
N$21: C19.1 R12.1 R65.1
N$22: D13.1 R42.1 T4.C
N$24: C5.1 C6.2 C13.1 D3.C D4.C
N$26 [3v3]: IC1.7 RN1.2
N$27: RN7.4 U6.61
N$28: C122.3 RN11.6
N$29: C13.3 C123.6
N$30: RN7.1 U6.64
N$32: C122.5 RN12.4
N$33: C122.4 RN11.5
N$34: R51.1 U4.12
N$35: D14.A R51.2 TR1.1
N$36: C121.3 RN7.7
N$37: Q3.3 R17.1
N$38: Q4.1 R19.2
N$39: C20.1 Q1.2 R6.1 U4.39
N$40: Q2.3 R16.1
N$41: C109.1 Q102.1 R109.1
N$42: IC1.3 RN1.4
N$43: Q3.1 R15.2
N$44: Q2.1 R14.1
N$45: C121.4 RN7.6
N$46: C39.1 D14.C U4.13
N$47: R18.1 U6.7
N$48: RN3.2 U4.49
N$49: RN3.3 U4.50
N$50: C26.1 C123.5 R16.2
N$51: C40.1 R47.1 TR102.1 U4.14
N$52: RN7.2 U6.63
N$53: C29.1 C123.4 R17.2
N$54: R24.1 U7.2
N$55: C27.1 C123.3 R21.2
N$56: C121.5 RN7.5
N$57: D102.1 RL1.8 T2.5 T2.6
N$58: D4.A L2.2 U2.1
N$59: C121.6 RN100.8
N$60: C19.3 C119.6
N$62: IC3.1 R33.1
N$63: D11.A U7.1
N$64: C45.1 U9.1
N$65: C114.2 U6.56
N$66: R13.2 U$1.4
N$67: C46.1 R53.2 R55.2
N$68: C120.5 RN100.5
N$69: C120.4 RN7.8
N$70: C120.3 RN100.6
N$71: C118.1 R64.1 U101.12
N$72: R53.1 TRF1.15
N$73: R55.1 TRF1.10
N$74: D101.1 RL4.8 T5.5 T5.6
N$75: D102.2 RL2.8 T2.7 T2.8
N$76: RL1.6 RL4.3
N$77: C17.1 R9.1 R11.2 U10.5
N$78: RL1.3 RL4.6
N$79: Q103.1 Q104.3 R117.1
N$80: C44.1 C47.1 TRF1.2 TRF1.7
N$81: D101.2 RL3.8 T5.7 T5.8
N$82: RN7.3 U6.62
N$83: RL2.3 RL3.3
N$84: RL2.6 RL3.6
N$85: C100.2 D100.2 R101.2 TR100.2
N$86: C104.1 R106.1 TR101.5 TR101.6
N$87: D101.3 D102.3 TR101.3
N$88: D100.3 R100.2
N$89: R75.1 U8.6 U8.7
N$90: C37.1 R36.2 R37.2 U8.2
N$91: R34.1 R35.2 U8.3
N$92: R107.1 T100.7 T100.8 TR100.5
N$93: C37.2 R24.2 R37.1 U8.1
N$94: RN100.1 U6.60
N$95: C101.1 Q100.2 R108.1
N$96: D10.3 OK1.1 R22.2 T1.C
N$97: C101.2 Q100.1 Q101.1 R103.2
N$98: RN100.2 U6.53
N$99: R71.1 RN100.3 U6.2 U6.52
N$100: RN100.4 U6.51
N$101: RN11.3 U6.45
N$102: RN11.4 U6.44
N$103: RN11.1 U6.50
N$104: RN11.2 U6.49
N$105: RN12.6 U6.31
N$106: RN12.5 U6.32
N$107: R13.1 U6.1
N$108: RN8.8 U4.29
N$109: RN8.7 U4.30
N$110: RN8.6 U4.31
N$111: RN8.5 U4.32
N$112: C119.10 U$1.3
N$113: C120.6 RN100.7
N$114: C122.10 U$1.11
N$115: U4.8
N$116: RN3.1 U4.51
N$117: R68.1 U6.43
N$118: C120.9 U$1.6
N$119: RN3.4 U4.48
N$121: RN13.8 U$2.7
N$122: C120.10 U$1.5
N$123: Q103.3 R64.2
N$124: RN6.7 U4.2
N$125: RN6.6 U4.3
N$126: RN6.5 U4.4
N$127: RN6.8 U4.1
N$128: RN10.8 U4.5
N$129: RN10.7 U4.6
N$130: RN9.8 U4.21
N$131: RN9.7 U4.22
N$132: RN9.6 U4.23
N$133: RN9.5 U4.24
N$134: RN4.1 U4.61
N$135: RN4.2 U4.60
N$136: RN4.3 U4.59
N$137: RN4.4 U4.58
N$138: RN5.2 U4.64
N$139: RN5.3 U4.63
N$140: RN5.4 U4.62
N$141: C123.7 U$1.23
N$142: C123.8 U$1.22
N$143: C123.9 U$1.21
N$144: C122.7 U$1.14
N$145: C122.8 U$1.13
N$146: C122.9 U$1.12
N$147: C122.6 RN12.3
N$148: C123.10 U$1.24
N$149: C121.9 U$1.8
N$150: RN12.8 U6.3
N$151: C121.7 U$1.10
N$152: C121.8 U$1.9
N$153: R69.1 U$1.18
N$154: C120.8 U$1.15
N$156: C120.7 U$1.16
N$157: C121.10 U$1.7
N$158: R69.2 U10.1 U10.2
N$159 [3v3]: C119.9 U$1.2 U$1.20
N$160: C48.1 R58.1 R110.2
N$161: C119.4 R72.1 RN12.1
N$162: C50.1 R68.2 U10.3
N$163: R66.1 R67.2 U10.6
N$164: RN13.7 U$2.8
N$165: RN13.6 U$2.9
N$166: RN13.5 U$2.10
N$167: R65.2 R66.2 U10.7
N$168: C119.8 U$1.17
N$921: RN2.2 U4.45
N$931: RN2.3 U4.44
N$961: RN2.4 U4.43
N$9121: RN2.1 U4.46
NEMATX: IC3.4 RN8.3 U100.1
NETBUSY: IC2.7 R28.1 R29.1 RN2.8
NETRX: D12.3 IC2.1 R25.1 R30.2 R31.1 RN2.7
NETTX: C41.1 R63.2 RN8.4 U7.4
NMEA1: OK1.7 R23.1 RN2.6
NMEA-IN-A: J3.5 RL2.4
NMEA-IN-B: J3.6 RL2.5
NMEA-OUT-A: C31.1 IC3.6 J3.7 U100.7
NMEA-OUT-B: C36.1 IC3.7 J3.8 U100.6
NMEAA: R22.1 RL3.2
NMEAB: D10.1 R20.1 RL3.7 T1.E
OSC1: C105.1 Q102.2 U9.23
PGC: SV2.4 U4.17
PGD: SV2.3 U4.18
PHY3V3: C102.1 C106.1 C107.1 C108.1 L100.1 Q5.2 Q5.3 R57.1 U9.15 U9.19 U9.20 U9.25 U9.28
PHY-POWER: Q5.5 R62.2 U4.15
PHY_CS: RN8.1 U9.9
PHY_INT: R73.2 U4.42
PHY_INTERRUPT: R73.1 R112.1 U9.4
PHY_RESET: R111.1 U9.10
PHY_SCK: U4.33 U9.8
PHY_SI: RN6.1 U9.7
PHY_SO: RN8.2 U9.6
PHYCLKOUT: TP1.TP U9.3
PWMB: R19.1 U6.11
PWMBL: R3.1 U2.4 U6.5
PWMFB: C6.1 D3.A Q2.2 Q3.2 Q4.2 R4.2 U2.3
PWMG: R15.1 U6.8
PWMKEY: R1.1 U1.4 U6.12
PWMR: R14.2 U6.6
RB8: R114.2 RN9.1 T2.2
RB9: R115.2 RN9.2 T2.4
RB10: R54.2 RN9.3 T5.2
RB11: R52.2 RN9.4 T5.4
RBIAS: R56.2 U9.14
RELAY-TOPS [5V]: RL1.1 RL2.1 RL3.1 RL4.1 TR100.3 TR100.6
RST_BT: U4.52 U101.11
RX-FROM-TERMINAL: J2.3 U4.27
RX_BT: RN11.7 U4.54 U101.2
SHOOT-THRU-INHIBIT: C110.1 R113.1 T100.2 T100.5 T100.6
SI_FL: IC1.5 RN3.7
SO_FL: IC1.2 RN3.5
SS_LCD: RN6.2 U6.18
TP3V3: C103.1 L100.2 R104.1 R105.2
TPIN+: R110.1 TRF1.3 U9.13
TPIN-: R58.2 TRF1.1 U9.12
TPOUT+: R105.1 TRF1.8 U9.17
TPOUT-: R104.2 TRF1.6 U9.16
TX-TO-TERMINAL: J2.1 U4.34
TX_BT: RN11.8 U4.55 U101.1
Z-MEASURE: R38.2 R39.1 R75.2 U4.16
Z-OP: C38.1 D11.C R38.1 R76.1 U8.5

## Tracks (layer width: path | path; a pad name or v marks a point on that pad's centre or on a via)
!CE_FL  (via drill 0.3)
  Top-VerticalRoutes 0.2: RN3.8 13.3,17.5 12.5,18.3 12.5,21.3 11.9,21.9 v11.9,27.4 | RN1.3 11.2,30.3 11.9,29.6 16.6,29.6 | v16.6,27.4 16.6,29.6 | 16.6,29.6 IC1.1
  BottomnHorizontalroutes 0.2: v11.9,27.4 v16.6,27.4
+3V3  (via drill 0.3, 0.5)
  Top-VerticalRoutes 0.2: U4.57 20.1,13.05 20.6,12.55 v20.6,12.5 | U4.10 v25.06,6.3 | v26.6,13.55 27.2,13.55 27.7,14.05 U4.26 | U4.38 v25.55,17.4 | v26.9,9.6 26.9,10.25 27.2,10.55 U4.19 | R112.2 98.35,11.5 | D5.1 8.5,24.05 v8.5,22.6 8.5,22.5 | C21.1 31.75,19.1 | SV2.1 43.38,2.52 | v55,17.8 55,17.7 | R47.2 31.3,35.25 v31.3,36.4 | v102.2,10 102.2,10.9 R111.2 | R71.2 63.45,18.55 v62.9,19.1
  Top-VerticalRoutes 0.254: v39.5,9.4 R32.2 41.35,8.6 44.6,8.6 45.15,8.05 R74.2
  Top-VerticalRoutes 0.3: U5.2 U5.4 34.23,51.94 34.8,52.4 v34.8,53.2 | C8.1 10.4,2.4 10.7,2.7
  Top-VerticalRoutes 0.305: R57.2 110.6,11 110.9,10.7 v110.9,10.3
  Top-VerticalRoutes 0.35: C30.2 C25.1 44.85,54.5 C24.1 | Q5.4 112.8,11.8 R61.2 112.75,10.3 v110.9,10.3 | v11.2,5.3 11.2,4.2 10.7,3.7 10.7,2.7
  Top-VerticalRoutes 0.406: D6.5 v9.2,15.5 | D7.5 v9.2,5.3 | 31.75,19.1 v30,19.1 | 55.05,22.05 v55.1,22 55.1,22.75 C117.1 | C113.1 56.9,17.45 56.9,16.4 57.5,15.8 v57.3,15.8 | C116.2 58.1,19.85 58.1,19.5 57.6,19 56.2,19 v55,17.8 | v4.1,32.1 3.6,32.1 3.1,32.6 1.95,32.6 C52.1
  Top-VerticalRoutes 0.61: C24.1 C30.2 v46.8,52.9 | C22.2 38,52.7 v38.7,52.1 | v98,9.7 98.5,10.2 98.5,11.35 R112.2
  3V3&5V 1.27: v38.7,52.1 46,52.1 v46.8,52.9
  BottomnHorizontalroutes 0.2: C124.2 27.7,11.9 27.6,12 27.6,13.15 27.2,13.55 v26.6,13.55 | v26.9,9.6 27.4,9.1 C125.1 | Q103.2 32.45,48.55 v32.1,48.2 | C131.1 v9.2,15.5 | 32.35,49.4 Q103.2 | C100.1 112.35,46.7 R102.2 116.1,42.75 116.1,34.2 113.6,31.7 v113.6,28.6 | U6.19 53.9,17.1 54.3,17.1 v55,17.8 | U6.26 53.02,20.6 54,20.6 54.3,20.9 54.3,21.7 54.6,22 v55.1,22 | 57.9,14.25 U6.10 57.8,14.12 57.8,15.3 v57.3,15.8 | R117.2 30.6,53.6 31.8,52.4 31.8,50.4 32.2,50 32.2,49.75 Q103.2 | 57.3,27 C115.1 57.32,26.87 57.4,26.6 57.4,26.1 U6.38 | U6.57 63.3,19.5 v62.9,19.1 | C127.1 20.85,12.25 v20.6,12.5 20.65,12.45 | R72.2 62.25,27.35 61.9,27.3 v60.9,27.3
  BottomnHorizontalroutes 0.254: 55.05,28.45 C28.2 | U6.35 55.85,26.81 55.6,27.06 v55.6,27
  BottomnHorizontalroutes 0.35: C126.2 25.32,4.7 25.06,4.95 v25.06,6.3
  BottomnHorizontalroutes 0.406: C119.5 70.3,28.6 69.3,27.6 v68.6,27.6 | v4.1,32.1 2.03,32.1 U$2.4 | 55.05,28.45 55.5,28 55.5,27.1 v55.6,27 55.73,26.87 57.32,26.87
  pour 3V3&5V: 88.8,29 114.1,29 116.1,27 116.1,3 114.1,1 3.1,0.9 3.1,36 31.1,36 31.1,54 40.1,54 42.1,52.5 42.3,52.3 45.1,52.3 46.1,51 46.2,29.7 46.8,29.2 87.6,29.1
+5V  (via drill 0.3, 0.5)
  Top-VerticalRoutes 0.2: 68.39,50.05 IC3.8 | C32.1 v66.2,51.7 | C42.1 47.4,38.2 47.2,38.4 v46.1,38.4 | 47.25,19.95 IC2.8 47.25,17.63 arc45 47.3,17.5 47.3,16.55 R29.2 48.49,15.46 arc45 48.63,15.4 48.7,15.4 | 47.25,19.95 v47.2,20 | 17.95,53.2 17.9,53.1 | 17.9,53.1 v17.9,54.9 | L1.1 17.9,53.1 | R23.2 59.9,36.3 60.15,36.55 60.6,36.55 60.8,36.75 60.8,38.05 OK1.8 | IC3.2 69.71,44.12 69.6,44 69.6,43.7 v69.1,43.2 | C43.1 46.8,40.4 46.55,40.15 D15.3 45.96,40.2 46.1,40.2 v46.1,41.2 | 47.25,19.95 47.53,20.24 arc-45 47.67,20.3 49.5,20.3 49.5,19.85 arc-90 C35.1 | 48.8,15.4 48.7,15.4 | R26.2 41.55,15.7 40.4,15.7 39.7,15 39.7,13.28 arc45 39.76,13.14 41.9,11.1 47.32,11.1 arc45 47.56,11.16 49.7,13.2 49.7,14.42 49.68,14.42 48.7,15.4 | 90.6,7.4 L2.1 | R46.1 49.9,32.75
  Top-VerticalRoutes 0.35: C32.1 68.39,50.05 | U5.3 30.7,57.97 30.7,57.4 30.6,57.5 v29.4,57.5 | v29.4,57.5 v31.9,57.5 | C16.1 27.65,57.5 v29.4,57.5 | C23.2 v40.5,56.9
  Top-VerticalRoutes 0.406: OK1.8 60.8,38.09 60.8,39.5 60.5,39.5 v59.95,40.05 | 39.7,32.9 v39.7,33 R50.1 | 47.3,48.8 U3.5 46.9,48.8 | C49.+ 79.38,29.9 | U8.8 v65.2,36 | U7.6 58.15,29.75 v58.1,29.7 | R63.1 v29.7,30 | 49.9,32.75 v49.9,30.6
  Top-VerticalRoutes 0.5: U3.5 49,48.75 49.2,48.95 C10.1 | U1.5 20.4,53.9 20.4,54.37 C1.1 | U2.5 88.55,7.3 90,7.3 | 90,7.3 L2.1 | 90.8,7 90,6.9 90,7.3
  Top-VerticalRoutes 0.61: OK1.8 61.49,38.09 61.95,38.55 C33.1 | 79.38,29.9 79.3,29.9
  Top-VerticalRoutes 0.8: 17.9,53.1 19.1,53.1 19.7,53.8 20.3,53.8 20.4,53.9 | C1.1 20.45,56.65 v20.5,56.7
  Top-VerticalRoutes 0.813: C10.1 49.6,49.5 49.6,50.9 | 90.8,7 v90.8,5.1 C4.1 | C35.1 50.95,19.75 51.5,20.3 v51.5,20.4 | R31.2 51.5,22.05 v51.5,20.4 | v51.5,20.4 51.4,20.4 | C49.+ 80.3,28.9 79.3,29.9 v77.4,29.9
  Top-VerticalRoutes 1.016: L3.1 49.6,50.9 49.8,50.9 J3.1
  3V3&5V 0.406: v29.7,30 37.8,30 39.7,31.9 v39.7,33
  3V3&5V 0.813: v46.1,38.4 v46.1,41.2 | v46.1,38.4 48.9,38.4 48.9,42.3 60,42.3 59.95,42.25 v59.95,40.05 | v46.1,38.4 40.7,33 v39.7,33 | v77.4,29.9 82.6,29.9 83,29.5 83,18.1 90.5,10.6 90.5,5.4 v90.8,5.1
  3V3&5V 1.27: v49.9,30.6 49.9,23.85 R31.2 51.6,20.5 v51.5,20.4
  BottomnHorizontalroutes 0.2: U100.3 69.1,44.95 v69.1,43.2 65.8,43.2 65.3,43.7 C111.1 | 59.2,29.5 59.4,29.5 59.55,29.65 59.55,29.7
  BottomnHorizontalroutes 0.3: Q101.2 R108.2 v100.5,37.3
  BottomnHorizontalroutes 0.406: R118.1 15.5,4.35 15.5,11.6 17.3,13.4 17.3,20.8 19.1,22.5 19.1,28.3 17,30.4 17,32.2 v22.7,37.8 | v58.1,29.7 59.55,29.7 C112.1
  pour 3V3&5V: 113.1,60 14.8,59.8 14.8,52.7 14.9,46.5 14.7,36.9 30.1,37 30.1,55 41.1,55 42.6,53.5 45.1,53.5 47.1,52 47.1,30.5 47.8,30 114.1,30 116.1,32 116.1,58
BLUETOOTH_PWR  (via drill 0.3)
  Top-VerticalRoutes 0.2: v33,33 33,40.6 34.3,41.9 34.3,42.1 v34.3,43.8 | RN2.5 v21.3,33
  BottomnHorizontalroutes 0.2: Q104.1 | Q104.1 34.3,45.25 35.1,46.3 36.25,46.35 R116.2 | v34.3,43.8 34.3,45.15 Q104.1 | v21.3,33 v33,33
CAN-RX  (via drill 0.3)
  Top-VerticalRoutes 0.2: U4.28 29.96,15.1 31.3,15.1 31.7,14.7 32,14.7 32.7,14 36.5,14 37.3,14.8 37.3,16.5 36.3,17.4 36.25,38.6 36.25,40.75 36.55,41.05 36.55,43.1 v36.6,43.15
  BottomnHorizontalroutes 0.2: U100.4 67.79,46.41 66.4,47.8 64.5,47.8 59.85,43.15 v36.6,43.15
CAN-SLEEP  (via drill 0.3)
  Top-VerticalRoutes 0.2: IC3.3 71,44.91 71,46.3 71.9,47.2 v71.9,48.4 | U4.35 27.04,20.34 28.2,21.5 28.2,33.8 29,34.6 v29,37
  Top-VerticalRoutes 0.254: IC3.3 71.1,44.9 71.1,43.5 71.8,42.8 v71.8,40.9
  BottomnHorizontalroutes 0.2: v71.9,48.4 71.6,48.7 U100.8 | 63.3,39.1 31.1,39.1 v29,37
  BottomnHorizontalroutes 0.254: v71.8,40.9 71.2,40.9 71,41.1 66.2,41.1 66,40.9 65.1,40.9 63.3,39.1
CK_LCD  (via drill 0.3, 0.5 pad 0.25)
  Top-VerticalRoutes 0.2: SV1.4 48.96,3.7 48.9,3.8 48.9,8.16 53.9,12.8 v55.3,12.8 | RN6.4 22.5,2.8 22.5,2.2 v22.9,1.8
  BottomnHorizontalroutes 0.2: v22.9,1.8 29.8,1.8 33,5.1 47.6,5.1 48.76,4 SV1.4 | U6.15 55.3,14.2 55.4,14.3 55.3,13.7 v55.3,12.8
CLK_FL
  Top-VerticalRoutes 0.2: RN1.1 10.45,28.6 13.7,28.6 14.06,28.23 IC1.6 14.06,21.57 13.4,20.9 13.4,19.3 13.6,19.1 RN3.6
COMMSA  (via drill 0.3)
  Top-VerticalRoutes 0.2: R44.2 D13.3 v46.3,32.7 | v105.9,50.2 RL4.2 | v77.1,33.1 77.1,35.7 75.5,37.3 R35.1 | v107.7,50.2 107.7,51.1 108.1,51.5 113.6,51.5 116.1,49 116.1,35 115.1,34 v112.7,34
  BottomnHorizontalroutes 0.2: v105.9,50.2 v107.7,50.2 | v46.3,32.7 57.9,32.7 58.3,33.1 v77.1,33.1 94.8,33.1 95.7,34 v112.7,34
COMMSB  (via drill 0.3)
  Top-VerticalRoutes 0.2: R36.1 74.1,35.1 74.2,35 v75.9,35 | T3.C 44.15,31.55 44.15,31.25 44.1,31.2 v44.1,32.7
  Top-VerticalRoutes 0.254: T3.C 44.9,30.6 44.9,28.6 R43.2
  Top-VerticalRoutes 0.3: v112.6,38.2 112.6,49.7 112.1,50.2 RL4.7
  BottomnHorizontalroutes 0.2: v75.9,35 74.5,33.6 58,33.6 57.8,33.4 44.8,33.4 v44.1,32.7
  BottomnHorizontalroutes 0.35: v75.9,35 111.6,35 112.6,36.1 v112.6,38.2
CONTRAST  (via drill 0.3)
  Top-VerticalRoutes 0.2: R11.1 66.55,24.85 66.2,24.5 66.2,23.9 v65.8,23.5
  BottomnHorizontalroutes 0.2: v65.8,23.5 65.2,24.1 61.8,24.1 60.6,22.9 60.6,21.8 60.3,21.5 60.3,16.9 60.86,16.34 U6.4
DI_LCD  (via drill 0.3 pad 0.25, 0.5 pad 0.25)
  Top-VerticalRoutes 0.2: RN10.1 23.7,2.3 24.3,1.7 30.3,1.7 30.5,1.9 v31.1,1.9 | SV1.3 51.5,2.4 52.8,1.1 55,1.1 55.8,1.9 55.8,4.4 54.4,5.7 54.4,8.8 54.9,9.3 58.5,9.3 58.7,9.5 58.7,11.9 v59,12.2
  BottomnHorizontalroutes 0.2: SV1.3 50.3,1.3 50.1,1.3 50,1.3 49.9,1.2 46.4,1.2 45.7,1.9 44.6,1.9 44,1.3 31.8,1.3 v31.1,1.9 | v59,12.2 58.8,12 55,12 54.5,12.5 54.5,13.1 54.84,13.44 U6.16
DO_LCD  (via drill 0.3 pad 0.25, 0.5 pad 0.25)
  Top-VerticalRoutes 0.2: RN10.2 24.6,2.8 24.6,2.4 24.8,2.2 29.1,2.2 v31.6,4.8 | v55.9,16 56.5,15.5 56.5,12.1 53.9,9.5 53.9,5.2 v53.6,4.9
  BottomnHorizontalroutes 0.2: v31.6,4.8 32.3,5.5 48.2,5.5 48.8,4.9 v53.6,4.9 | U6.17 53.03,16 v55.9,16
EEPROM3V3  (via drill 0.3, 0.5)
  Top-VerticalRoutes 0.2: RN1.6 RN1.7 | IC1.8 16.6,23 16.5,22.9 15.6,22.9 15.5,22.8 15.5,21.85 C15.1 15.55,22.05
  Top-VerticalRoutes 0.25: RN1.5 RN1.6
  Top-VerticalRoutes 0.35: D5.3 9.5,26.2 v10.9,26.2 | v16.6,26.2 IC1.8
  Top-VerticalRoutes 0.406: C130.+ 22.42,37 v19.8,37 | RN1.7 7.7,29.5 7.4,29.2 7.4,27.7 8.3,26.8 9.5,26.8 D5.3
  BottomnHorizontalroutes 0.35: v10.9,26.2 v16.6,26.2
  BottomnHorizontalroutes 0.406: v19.8,37 16,33.1 15.9,30.1 17.7,28.2 17.7,26.8 17.1,26.2 v16.6,26.2
ETHRX+
  Top-VerticalRoutes 0.35: TRF1.14 98.9,41.7 98.65,41.95 RL3.5
ETHRX-
  Top-VerticalRoutes 0.35: TRF1.16 96.3,40.6 96.3,42.1 95,43.4 95,45.4 94.6,45.8 RL3.4
ETHTX+
  Top-VerticalRoutes 0.35: 105.2,40.59 TRF1.9 105.25,41.35 105.6,41.7 110.2,41.7 110.65,42.15 RL4.5
ETHTX-
  Top-VerticalRoutes 0.35: TRF1.11 102.7,42.7 103.65,43.65 RL4.4
GND  (via drill 0.3, 0.5)  (1 unrouted)
  Top-VerticalRoutes 0.2: R49.2 44.05,36.05 44.4,36.05 44.4,36 v45.6,36 | C36.2 v70.8,58.6 | C35.2 49.6,17.9 v49.6,16.6 | U4.41 24.05,17.35 v24.1,17.4 | 73.7,26.2 73.7,26.3 74.15,26.75 R39.2 C38.2 74.15,29.5 | U4.9 24.55,8.55 24.2,8.9 24.2,9.65 v24.15,9.7 | OK1.5 57.1,38.1 v57.1,40 | U9.2 97.12,17.88 v97.1,17.9 | C48.2 107.5,13.3 | 108.1,13.2 v108.1,14.6 | 102.97,25.32 v103,25.3 | IC1.4 12.03,32 v11.5,32 | U9.11 103,16.32 103,17.4 102.6,17.8 v102.3,17.8 | v70.35,43.35 R33.2 | U7.3 v63.99,31.89 v64,31.9 | 35.22,58.05 U5.1 | 12.8,4.75 C7.2 | v5.3,2.4 8.25,2.4 C8.2 | T5.1 93.07,58.58 93.4,58.6 92.4,58.6 | R54.1 v104.1,58.9 | R52.1 90.15,59.1 v88.4,59.1 | T2.1 76.9,50.54 76.9,51.8 | T2.3 75.6,50.54 75.6,51.5 75.9,51.8 76.9,51.8 | 76.9,51.8 v77.4,51.8 | C15.2 17.45,22.65 17.6,22.8 v17.6,23.3 | 29.8,13.6 arc-45 U4.25 31.35,13.55 v31.7,14 | C107.2 v92.4,24.15 | C108.2 94.05,18.35 94.1,18.3 94.6,18 v95.5,18 | U4.20 27.26,11.04 v26.6,11.7 | R27.1 v43.8,11.8 | C11.2 v22.7,45 | v51,40.4 C43.2 | C40.2 30.65,39.7 v30.6,39.7 | C114.1 62.1,17.7 v62.8,17.7 | C26.2 74.6,8.4 v74.6,8.7 | C29.2 74.1,5.1 74.15,5.05 74.95,5.05 75.6,4.4 v75.6,3.2 | R4.1 65.6,7 v65.6,6.1 | v94,12.9 94,14.3 C45.2 | T5.3 92.6,57.3 92.4,57.5 92.4,58.6 | 92.4,58.6 v91.7,59.2 | C27.2 74.1,3.6 | C50.2 81.9,16.6 v81.9,15.8 | R76.2 68.4,33.35 68.4,39.2 67.9,39.2 v67.9,39.23
  Top-VerticalRoutes 0.254: 114.4,36 TP3.TP | C46.2 114.7,36 114.5,36.2 TP4.TP
  Top-VerticalRoutes 0.3: v23.5,56.75 R1.2 | 21.35,53.12 21.35,53.25 | 22,53.9 C1.2 | R2.1 21.4,51.35 21.35,51.4 | v36.6,58.05 35.22,58.05 | v66.8,46.4 66.3,46.7 66.2,46.8 C32.2 | v12.8,6.3 12.8,4.75 | R34.2 v74.15,40.85
  Top-VerticalRoutes 0.305: v77.6,28.1 76.2,29.5 74.15,29.5 | 74.6,26.35 R39.2 | 108.1,13.2 C48.2 | U9.18 102.97,25.27 v103,25.3
  Top-VerticalRoutes 0.35: C24.2 42.65,56.3 v42.65,58.1 | C25.2 v44.77,58.1 | v94.7,36.7 94.6,35.1 94.5,35.2 93.05,35.2 C44.2 | 41.35,23.9 40.75,24.55 v40,25.4 | C31.2 v61.4,58.6 | U9.22 100.4,23.28 v100.4,21.8 | U9.21 101,23.33 101,24.7 v101.5,25.2 | LED1.C LED2.C | Q5.1 114.7,14.5 v114.7,16.2 | C47.2 v110.9,31.2 | TP2.TP v108.7,4.5 | C23.1 39.35,54.6 v39.2,54.6 39.2,55.3 38.8,55.7 37.95,55.7 C22.1 | C30.1 v46.8,58.1 | C39.2 v113.2,1.8 113.3,2 | 74.1,3.6 75.1,3.6 v75.6,3.2
  Top-VerticalRoutes 0.406: 43.4,23.9 43.44,23.86 IC2.4 v43.44,21.6 | 41.35,23.9 C34.2 | C14.2 v23.2,32.2 | C20.2 v25.6,32.15 | IC3.5 v73.5,50.1 | R33.2 v70.35,40.3 | C33.2 v61.4,40.45 | D7.2 v9.2,11 | D6.2 v9.2,20.7 | R56.1 v111.1,16.3 | C21.2 34.5,20.3 v34.5,21.05 | C16.2 25.35,57.7 25.2,57.85 24.25,57.85 v24.2,57.9 | R45.2 49.25,29 49.8,29 51.2,30.4 v51.2,30.6 | C11.2 C11.4 | R40.2 40.1,27.9 R41.2 | 42.71,48.3 C12.1 42.51,48.49 | C49.- v89.1,28.9 | C130.- 17.48,35.3 v14.8,35.3 | C117.2 57.1,22.85 57.1,22.2 56.7,21.7 56,21.7 v55.1,20.9 | C113.2 59.2,17.55 59,17.3 v58.1,16.4 | v55.1,19.3 55.4,19.6 55.8,19.6 56.3,20.1 C116.1 | LED2.C v113.4,21.9 | 110.7,21.9 v110.6,21.9 109.8,21.9 | C102.2 109.8,21.9 | C106.2 109.15,19.95 109.7,20.5 109.7,21.8 109.8,21.9 | v8.7,27.8 8.7,28.5 8.65,28.55 RN1.8 | v114.8,5.9 114.8,7.6 R62.1 | C52.2 1.9,30.4 2,30.3 3.5,30.3 v4.1,30.9 | C103.2 109.7,27.9 v111.3,27.9 | R8.2 v52.8,52.5 | R67.1 v90.8,27.4 | 89.9,18.6 U10.4 | U2.2 87.5,8.7 | C17.2 51.9,45.6 v53.4,45.6 | C13.4 C13.2 81.97,9.32 v81.3,10 | v67.9,39.23 69.2,39.23 U8.4
  Top-VerticalRoutes 0.5: C2.2 U1.2 21.35,51.4 | 21.35,53.25 22,53.9 | 42.51,48.49 43.2,47.8 U3.2 45.6,47.8 | 87.5,5.15 C4.2 | U2.2 C5.2 | 89.9,18.6 90.25,18.95 C51.1 90.65,18.95 v91.7,17.9 | 40.1,27.9 v40.1,27
  Top-VerticalRoutes 0.61: 46.55,45.55 45.6,46.5 45.6,47 | 87.5,5.15 87.5,8.7
  Top-VerticalRoutes 0.8: C1.2 v22.35,56.7 | 21.35,51.4 21.35,53.12 | C4.2 87.2,5.35 R3.2 86.05,5.35 v86.2,5.2
  Top-VerticalRoutes 0.813: R10.2 46.55,45.55 | 45.6,47 45.6,47.8 49.5,47.8 49.55,47.75 C10.2 | C46.2 114.4,36
  Top-VerticalRoutes 1.016: C10.2 51.35,47.55 v51.4,47.5
  BottomnHorizontalroutes 0.2: v5.3,2.4 R119.1 6.95,1.35 7.1,1.2 10.8,1.2 11.05,1.45 C129.2 | v28.1,50.8 U101.13 | R116.1 v36.6,52.2 | C131.2 v9.2,20.7 | v70.35,43.35 70.35,43.9 70.3,43.95 70.3,44.95 U100.2 | TR101.1 v88.75,53.05 | C110.2 72.3,56.2 71.6,56.9 v70.8,56.9 | R115.1 R114.1 v81.7,50.4 | T100.1 81.2,56.1 81.3,56 v82.9,56 82.9,54.9 82.7,54.7 81.29,54.7 T100.3 | R101.1 v108.9,50.8 | v98.1,52.3 98.05,52.3 97.8,52.55 C104.2 | TR100.1 v108.2,55 | v66.8,46.4 65.6,46.4 C111.2 | C125.2 31.8,9.1 v32.2,8.7 | C124.1 30.6,11.9 31.7,13 v31.7,14 | U6.9 58.35,15.45 58.1,15.7 v58.1,16.4 | U6.25 53.9,20.1 54.3,20.1 v55.1,20.9 | U6.20 54,17.6 54.3,17.9 54.3,18.5 v55.1,19.3 | U6.41 58.9,26.1 58.9,26.5 C115.2 59.05,27.45 59.4,27.8 | 59.4,27.8 59.3,27.8 | 59.4,27.8 v60.1,27.8 | C112.2 60.1,31.2 60.2,31.1 62.5,31.1 63.3,31.9 v64,31.9 | v74.6,8.7 72.6,8.7 C123.2 | C105.2 99.1,29 | 97.65,29 C109.2 | 68.57,29.98 68.57,29.95 C19.2 | C120.1 72.4,21.4 v73.6,21.4 | C122.1 v72.4,10.8 | C120.2 72.4,25.6 | C119.1 72.4,25.6 | 72.4,25.6 72.46,25.56 v73.26,25.56
  BottomnHorizontalroutes 0.254: v75.6,3.2 74.1,3.2 C123.1
  BottomnHorizontalroutes 0.3: Q101.3 v101.5,41.9 | R103.1 v107.9,43.9
  BottomnHorizontalroutes 0.305: v77.6,28.1 75.6,30.1 72.6,30.1 C119.2 72.3,30.1 68.7,30.1 68.57,29.98 | C19.2 C19.4 | U$1.19 79.27,9.07 v79.6,9.4
  BottomnHorizontalroutes 0.35: C126.1 v28.55,3.2 | Q104.2 v32.45,43.9 | C128.2 16.4,8.75 16.4,7.1 16.7,6.8 v17.5,6.8 | C127.2 22.6,8.85 v22.6,10.5
  BottomnHorizontalroutes 0.406: C118.2 24.25,57.85 v24.2,57.9 | 72.4,16.2 v73.5,16.2 | 2.07,31 4.3,31 v4.1,30.9 | v99.1,27.7 99.1,29 97.65,29 | U$2.3 2.09,33.1 3.5,33.1 3.7,33.3 v4.1,33.3 | C121.2 C120.1 | 72.4,16.2 C121.1 | C57.2 v6.8,7.7 8.35,7.7 C53.2 | C54.2 C55.2 v6.58,12.4 | C28.1 52.6,28.2 v51.5,28.2 | 72.4,16.2 C122.2 | v52.8,52.5 53.3,52 C9.1 | C56.2 5.43,10.02 v6.68,10.02
  BottomnHorizontalroutes 0.61: U$1.1 77.27,27.1 | 77.27,27.1 76.9,27.1 | 77.27,27.1 77.6,27.1 v77.6,28.1
  pour GND: 10.6,60.7 112.6,61 117.1,57 117.1,4.5 113.1,0 4.1,0 0.1,4 0.1,40.3 10.8,40.3 10.8,42.5 10.7,42.5 10.7,46.6
  pour GND: 10.7,61.1 112.6,61 117.1,57 117.1,4.5 113.1,0 4.1,0 0.1,4 0.1,40.5 10.6,40.5
HI-2-SET-RELAYS  (via drill 0.3)
  Top-VerticalRoutes 0.2: U4.36 26.55,18.92 26.55,20.5 27.7,21.65 27.7,33 v27.75,35.5 | v75.8,57 74.4,55.6 74.4,51.3 74.3,51.2 74.3,49.5 74,49.2 74,45 77.4,41.6 v77.4,36.5
  BottomnHorizontalroutes 0.2: 74.3,56.1 74.4,56 74.4,56.05 R113.2 75.65,56.15 75.8,56.3 v75.8,57 | v77.4,36.5 77.1,36.8 41.5,36.8 39.9,35.5 v27.75,35.5
HI-4-RELAY-RESET  (via drill 0.3)
  Top-VerticalRoutes 0.2: v79.4,59.3 79.4,55.1 79.7,54.8 v79.7,54.5 | v90.7,55.3 89.5,55.3 | 89.5,55.3 89,55.8 89,57.9 88.6,58.3 87.2,58.3 86.7,58.7 v86.7,59.3 | U4.37 26.05,20.7 27.2,21.85 27.2,33.1 26.8,33.5 v26.8,35.5 | v88.3,37.3 88.3,45.7 88.6,46.2 88.6,49.9 89.5,50.8 89.5,55.3 | v106.9,45.5 106.9,55.7 107.5,56.3 110,56.3 110.5,56.8 v110.5,57.7
  BottomnHorizontalroutes 0.2: v79.4,59.3 v86.7,59.3 87.2,59.3 87.9,60 110,60 110.5,59.5 v110.5,57.7 | v79.7,54.5 80.07,54.12 T100.4 | TR101.2 90.4,53.8 90.7,54.1 v90.7,55.3 | v88.3,37.3 80,37.3 79.3,37.7 31,37.7 29.7,36.2 27.5,36.2 v26.8,35.5 | R100.1 113.05,58 | v106.9,45.5 110,45.5 110.4,45.9 110.4,46.35 R102.1
  BottomnHorizontalroutes 0.25: R100.1 112,57.8 111.9,57.7 v110.5,57.7
ID  (via drill 0.3)
  Top-VerticalRoutes 0.2: v25,9.1 25.45,9.1 25.55,9 25.55,8.99 U4.11
  BottomnHorizontalroutes 0.2: v25,9.1 25,8.2 24.2,7.4 18.8,7.4 18.4,7 18.4,6.2 18,5.8 16.6,5.8 16.4,5.6 16.4,2.65 16.2,2.45 R118.2 15.05,2.4 C129.1 12.95,3.65 12.8,3.8 9.1,3.8 8.85,3.55 R119.2
KB0
  Top-VerticalRoutes 0.2: D7.6 10.15,8 10.75,8.6 10.75,11.15 12.4,12.8 RN4.5
  Top-VerticalRoutes 0.35: 10.2,6.6 D7.6
KB1  (via drill 0.3)
  Top-VerticalRoutes 0.2: v11.15,6.4 11.15,10.8 12.35,12 RN4.6
  Top-VerticalRoutes 0.305: D7.4 v7.4,5.8
  BottomnHorizontalroutes 0.305: v7.4,5.8 8,6.4 v11.15,6.4
KB2  (via drill 0.3)
  Top-VerticalRoutes 0.2: v11.9,9.4 11.9,10.3 12.8,11.2 RN4.7 | D7.3 8.2,9.4 | 8.22,9.32 8.04,9 v1.3,9
  Top-VerticalRoutes 0.35: 8.22,9.32 D7.3
  BottomnHorizontalroutes 0.2: v11.9,9.4 10.5,9.4 10.1,9 v1.3,9 | RN13.4 v1.3,9 | v1.3,9 1.3,8.4 2,7.7 C57.1
KB3  (via drill 0.3)  (1 unrouted)
  Top-VerticalRoutes 0.2: RN4.8 13.7,10.4 v13.4,10.1 | D7.1 10.15,11.2 10.15,11.25 v9.5,11.9
  Top-VerticalRoutes 0.305: v9.5,11.9 7.5,11.9 6.9,11.3 v2.2,11.3
  BottomnHorizontalroutes 0.2: v13.4,10.1 13.4,10.7 12.2,11.9 v9.5,11.9 | RN13.3 2.1,16.4 1.9,16.2 1.9,13.1 2.2,12.8 v2.2,11.3
  BottomnHorizontalroutes 0.305: v2.2,11.3 3.4,10.1
KB4  (via drill 0.3)  (1 unrouted)
  Top-VerticalRoutes 0.2: RN5.5 v13.2,9.1
  Top-VerticalRoutes 0.406: D6.6 10.15,14.45 v8.6,12.9
  BottomnHorizontalroutes 0.2: v13.2,9.1 13.15,9.1 12.05,10.2 7.9,10.2 6.9,11.2 3.6,11.2 3.4,11.4 3.4,12.35 | RN13.2 2.9,16.4 2.4,15.9 2.4,13.4 3.4,12.4 C55.1
  BottomnHorizontalroutes 0.406: 6.9,11.2 v8.6,12.9
KB5  (via drill 0.3)
  Top-VerticalRoutes 0.2: RN5.6 v12.45,8.3
  Top-VerticalRoutes 0.305: 8.2,16.7 8.2,16.3
  Top-VerticalRoutes 0.35: 8.2,16.7 D6.4 | 8.2,16.3 7.8,15.9 5,15.9 4.8,16.1 v3.7,16.1
  BottomnHorizontalroutes 0.2: RN13.1 v3.7,16.1 | 3.7,15.7 3.7,14.95
  BottomnHorizontalroutes 0.305: v3.7,16.1 3.7,15.7 | 3.7,14.95 v3.7,16.1 | v3.7,16.1 6,16.1 8.2,13.9 12.2,13.9 14.2,11.9 14.2,8.7 13.8,8.3 v12.45,8.3
  BottomnHorizontalroutes 0.406: 3.7,14.95 C54.1
KB6  (via drill 0.3)  (3 unrouted)
  Top-VerticalRoutes 0.2: RN5.7 13.21,7.5 | D6.3 8.25,18.65 v7.7,18.1
  BottomnHorizontalroutes 0.2: 6.15,18.1 v7.7,18.1 7.7,20.5 8.9,21.7 10,21.7 16.4,15.3 16.4,14.7 14.8,13.1 14.8,8 14.3,7.5 v13.11,7.5 v13.1,7.51 v13.09,7.5 10.5,7.5 | R70.2 6.25,19.95 6.3,20 | 1.93,30 4,30 7.4,26.6 7.4,21.1 6.3,20 | 10.5,7.5 9.8,7.5 10.1,7.8 | 6.3,20 6.3,19.8 6.1,19.6 R70.1 | C53.1 10.35,7.65 10.5,7.5
KEY_BT  (via drill 0.3)
  Top-VerticalRoutes 0.2: U4.53 15.75,15.05 14.85,16 13.1,16 11.2,17.9 11.2,21 10.3,21.9 8.1,21.9 7.4,22.6 7.4,25.2 6,26.6 6,32.6 11.3,37.9 v11.3,38
  BottomnHorizontalroutes 0.2: 22.2,39.9 22,39.7 22,38.3 21.7,38 v11.3,38